# EAGLE board Digital Temperature Sensor Breakout - TMP102-GiantPanel (EAGLE 6.4), part 1 of 9
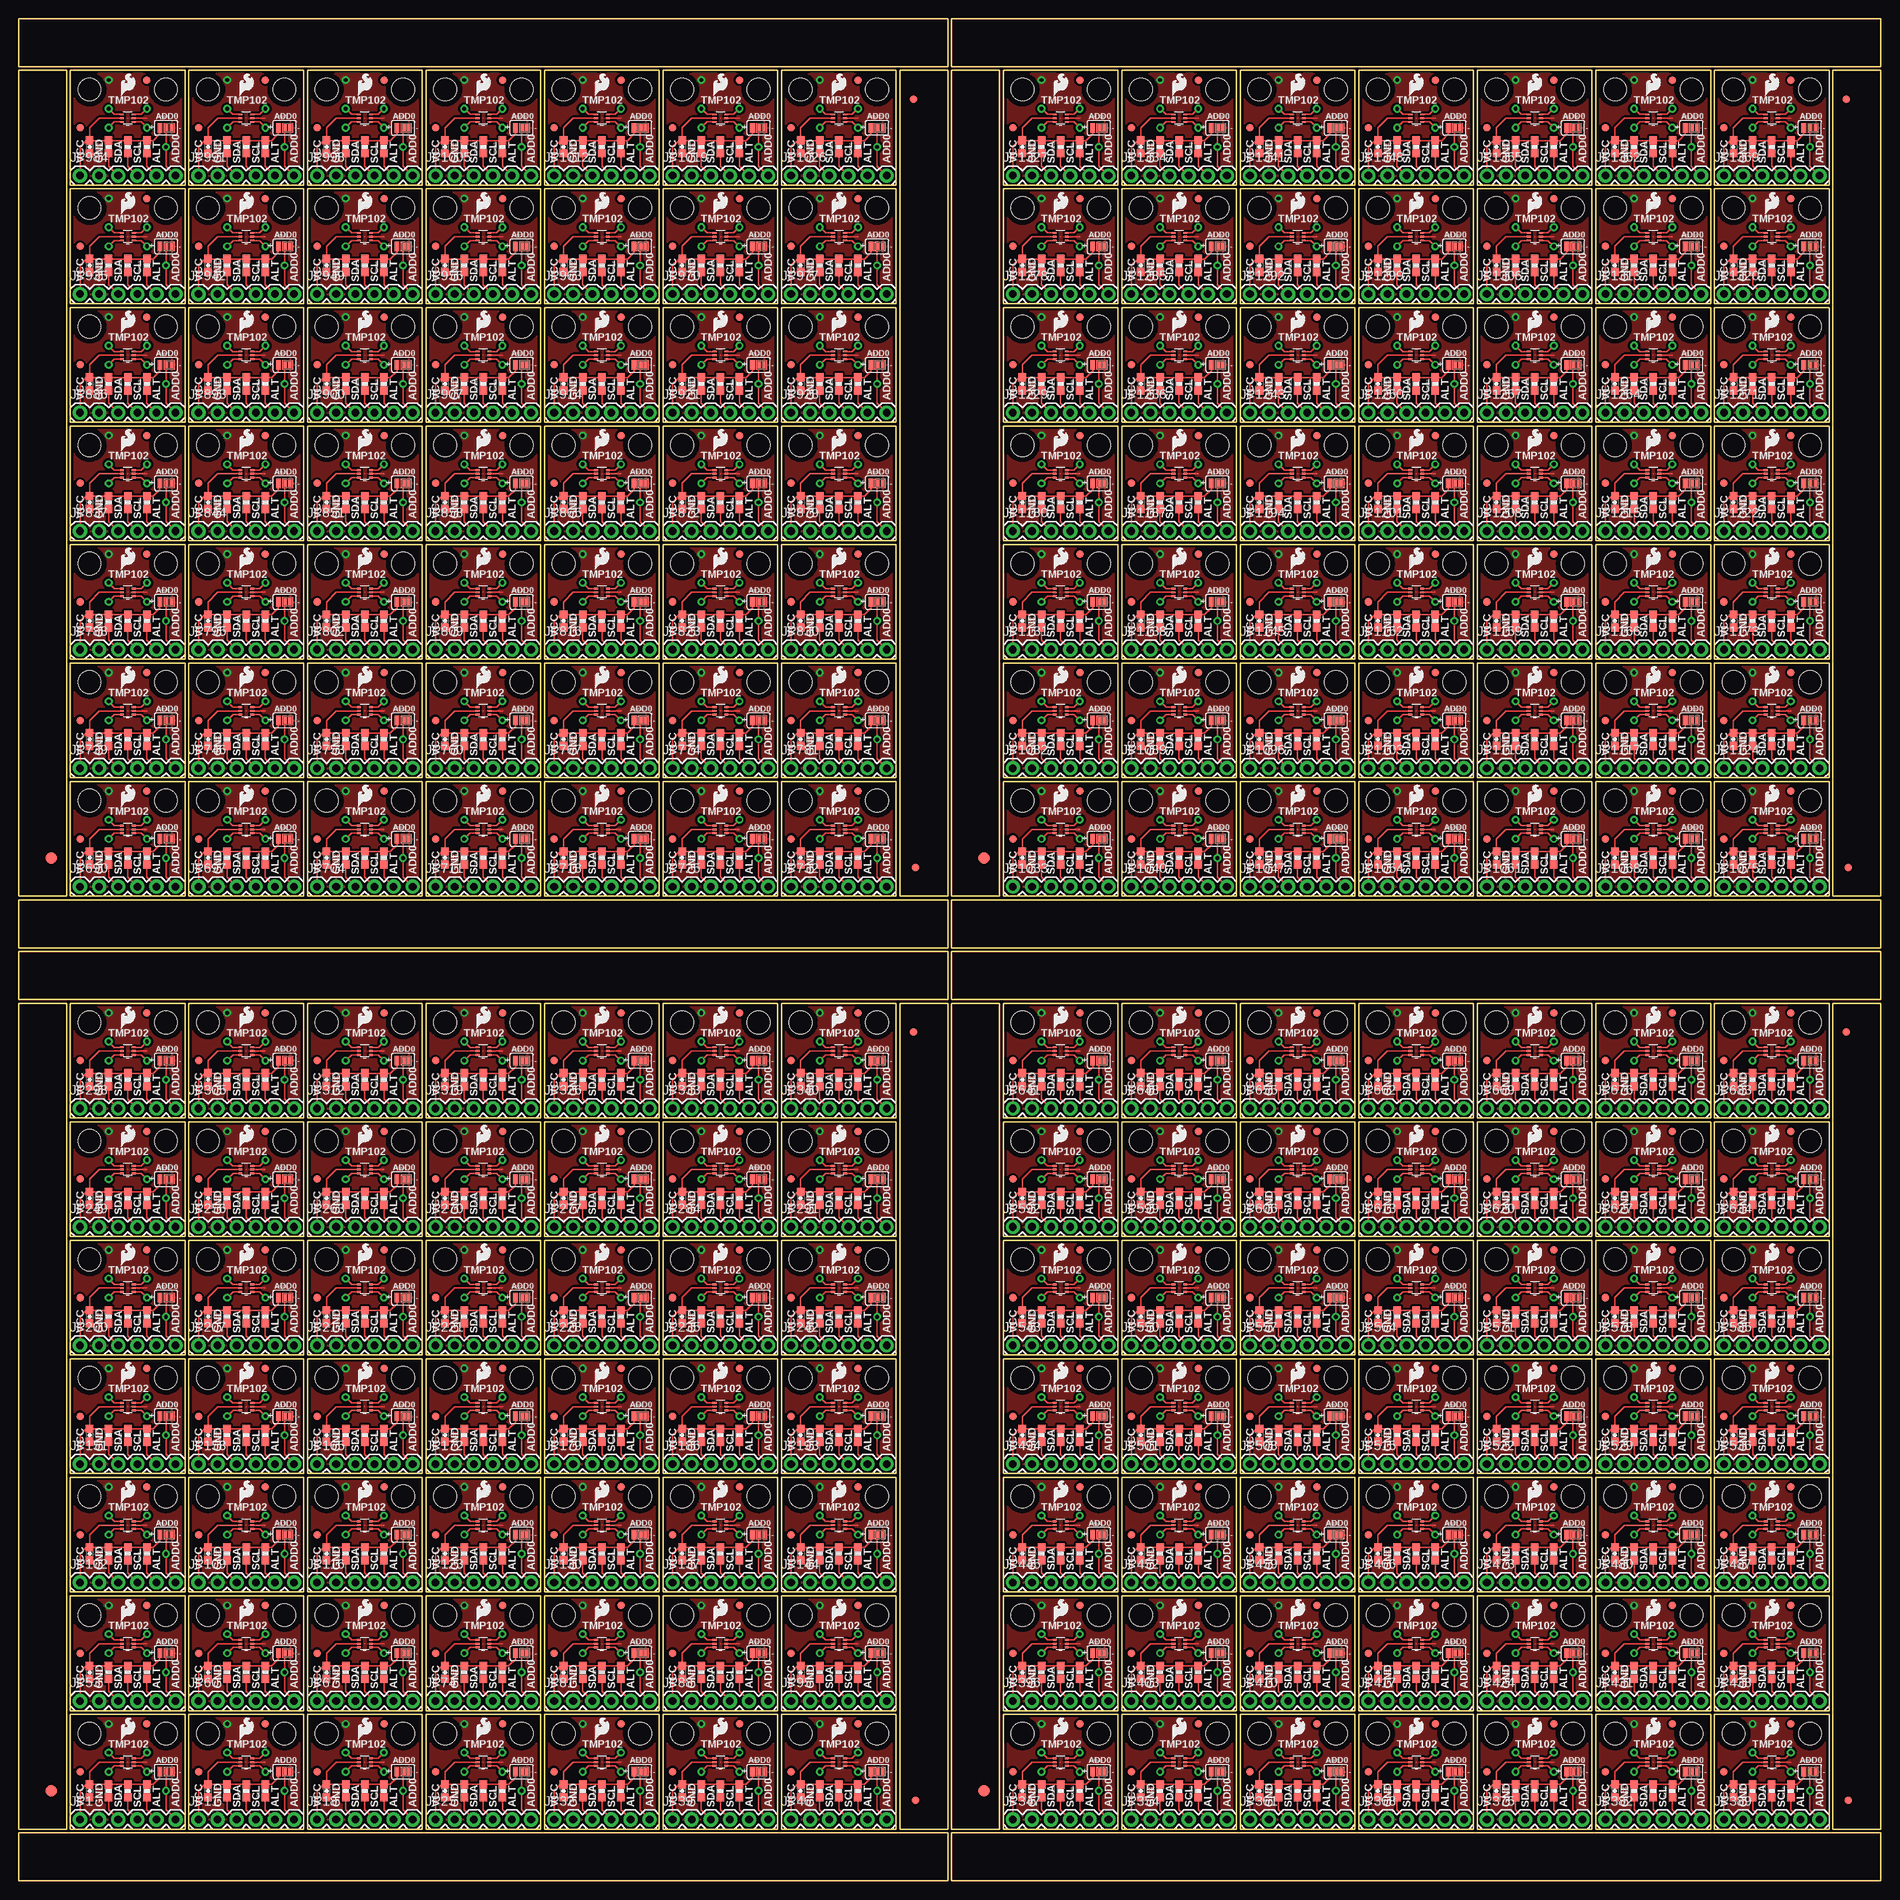
[diagram p0: board, top side]
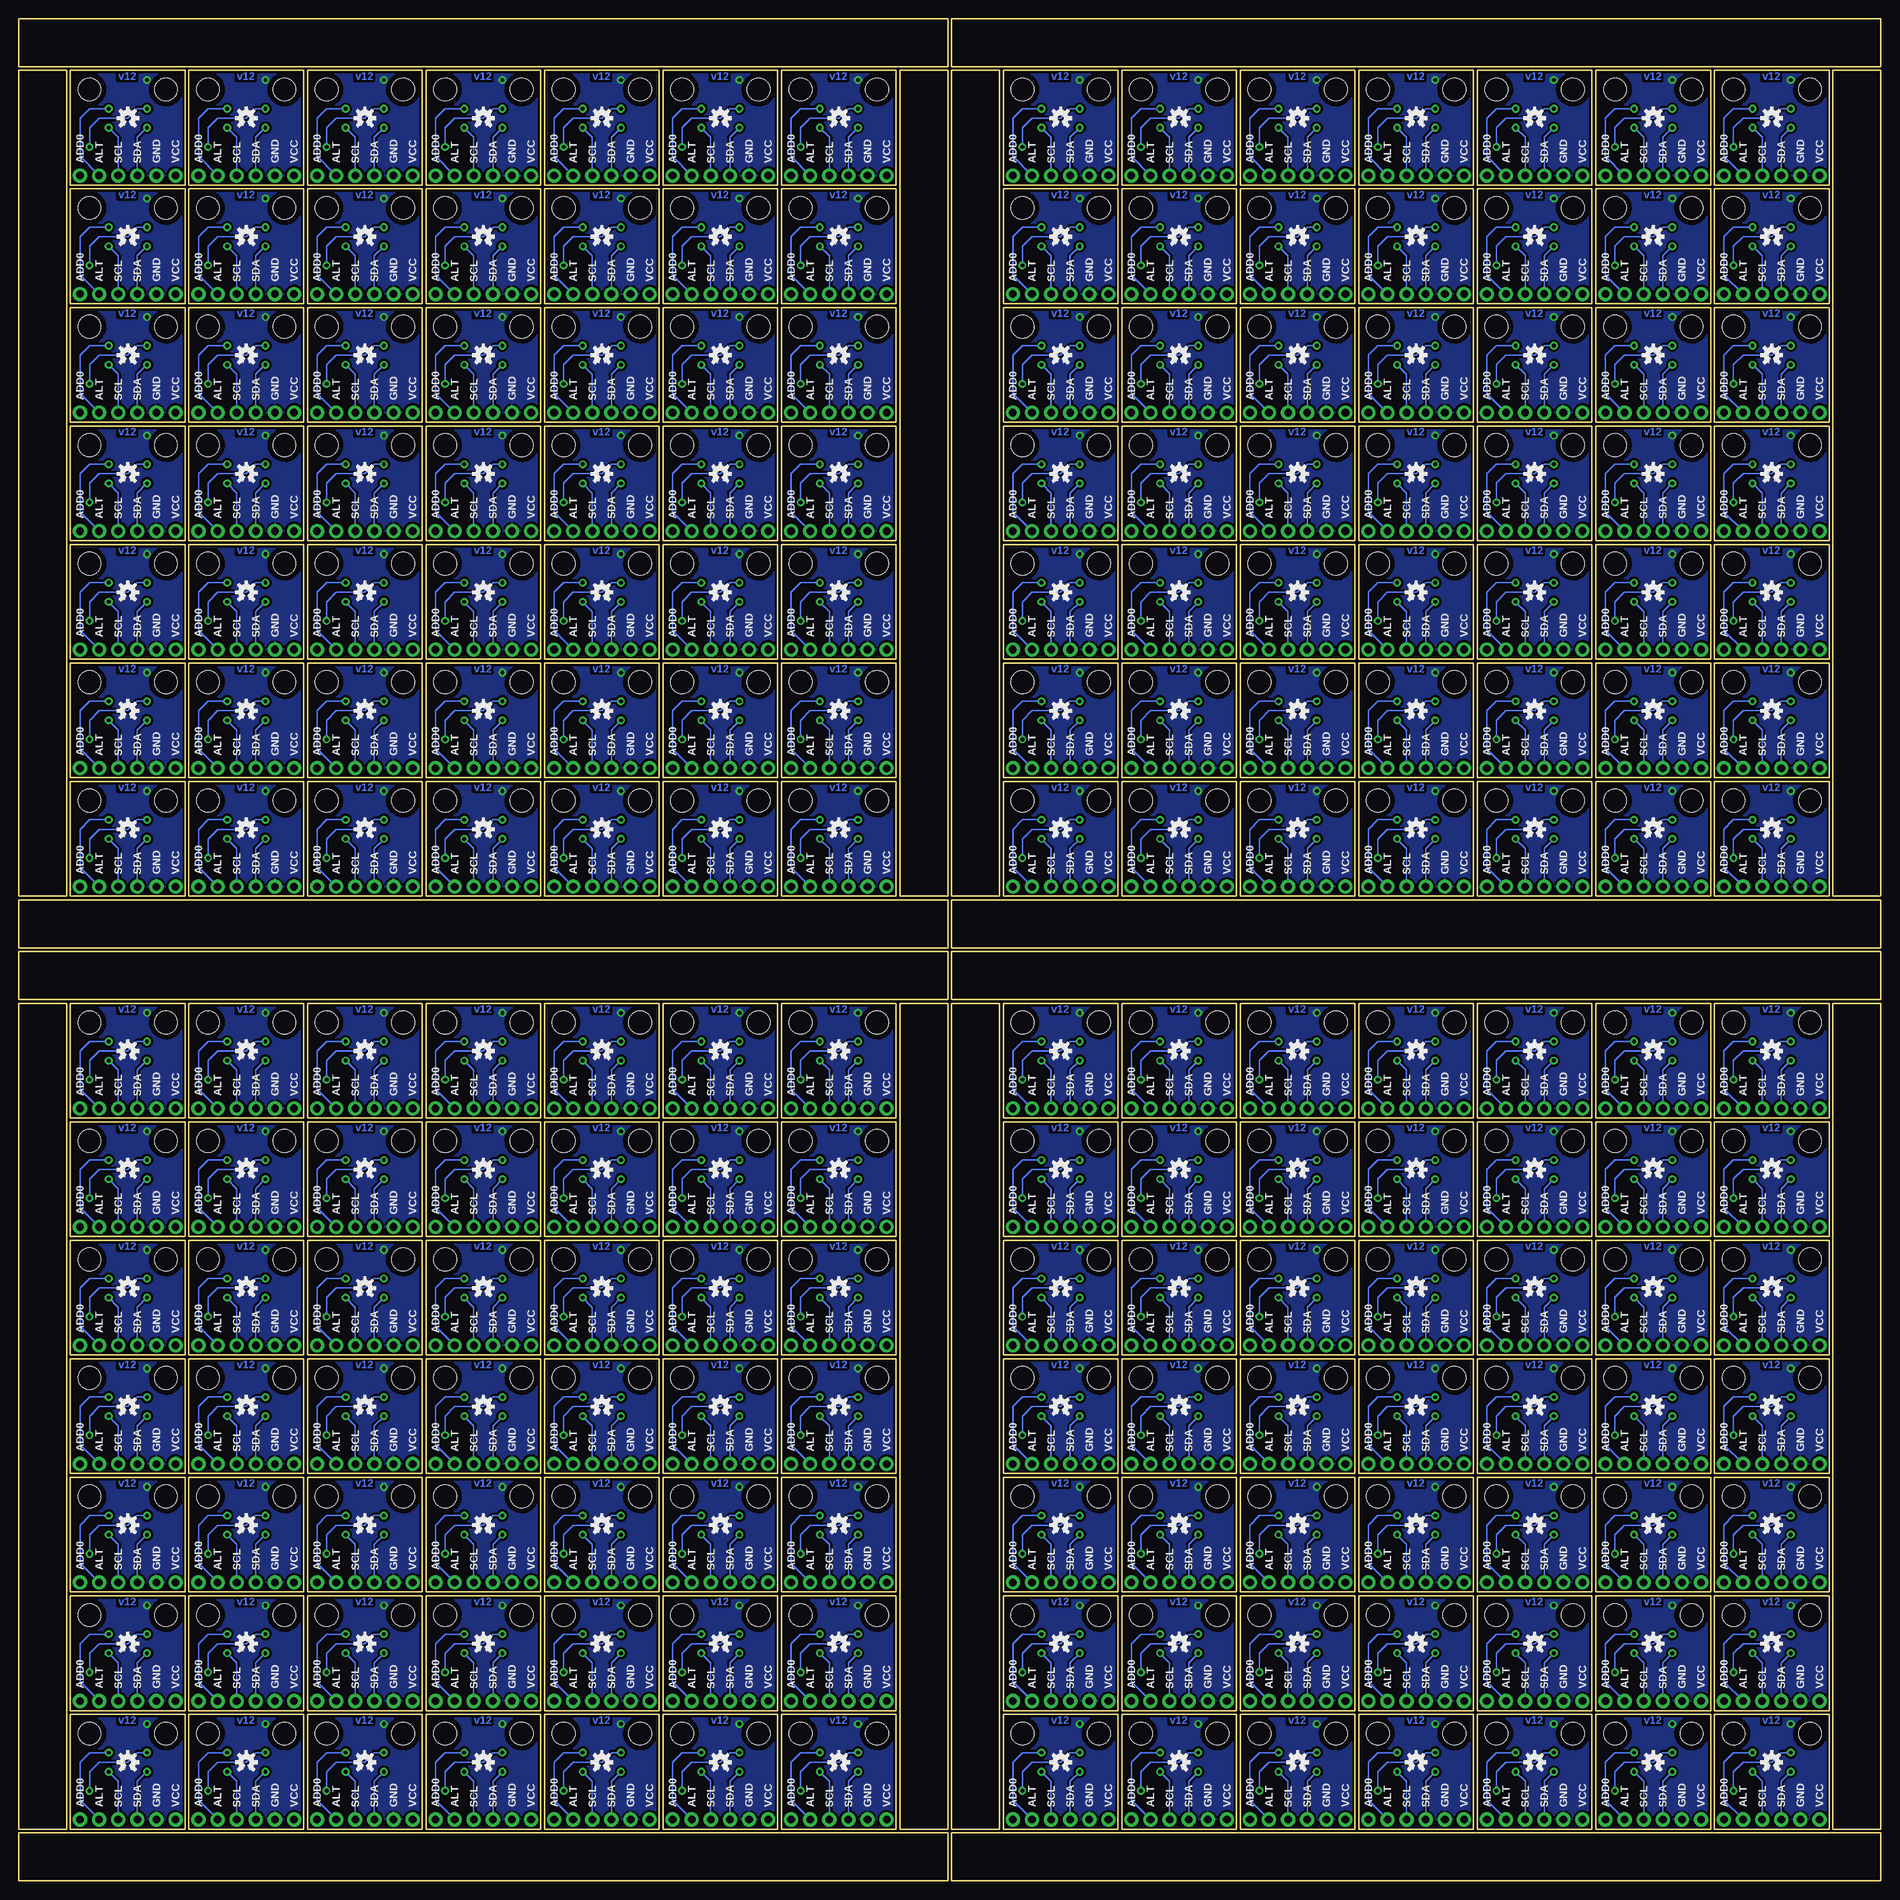
[diagram p1: board, bottom side, seen from below]

Size 247.4 x 247.4 mm. Coordinates in mm from the lower left corner, seen from the top.
Outline: 864 segments
Copper layers (1*16): Top 0.035mm / dielectric 1.5mm / Bottom 0.035mm
Design rules "SparkFun": minimum track width 7mil, minimum drill 15mil, track to track 8mil, track to pad 8mil, pad to pad 8mil, via to via 8mil, smd to smd 8mil, copper to edge 8mil, drill to drill 8mil, minimum pad ring 12mil, minimum via ring 10mil, stop-mask expansion 4mil, vias tented up to drill 20mil, thermal gap 10mil

## Footprints (pad centres in the part's own frame; a part is rotated, then mirrored left to right if it is on the bottom)
0603-CAP = smd 1.1 x 1: 1 -0.85,0; 2 0.85,0
FIDUCIAL-1.5X3 = smd 1.5 x 1.5: 1 0,0
FIDUCIAL-1X2 = smd 1 x 1: 1 0,0
1X06 = drill 1.016 pad 1.88: 1 0,0; 2 2.54,0; 3 5.08,0; 4 7.62,0; 5 10.16,0; 6 12.7,0
SJ_3_PASTE2&3 = smd 0.635 x 1.27: 1 -0.813,0; 2 0,0; 3 0.813,0
STAND-OFF-TIGHT = hole 3.048: 0,0
0603-RES = smd 1.1 x 1: 1 -0.85,0; 2 0.85,0
SOT563-2 = smd 0.508 x 0.249: 1 -0.8,0.498; 2 -0.8,0.003; 3 -0.8,-0.506; 4 0.776,-0.506; 5 0.776,0.003; 6 0.776,0.498

## Placement (x,y rotation side)
C1  0.1uF  [0603-CAP]  9.4,11.94 270 top
C2  0.1uF  [0603-CAP]  25.15,11.94 270 top
C3  0.1uF  [0603-CAP]  40.89,11.94 270 top
C4  0.1uF  [0603-CAP]  56.64,11.94 270 top
C5  0.1uF  [0603-CAP]  72.39,11.94 270 top
C6  0.1uF  [0603-CAP]  88.14,11.94 270 top
C7  0.1uF  [0603-CAP]  103.89,11.94 270 top
C8  0.1uF  [0603-CAP]  9.4,27.69 270 top
C9  0.1uF  [0603-CAP]  25.15,27.69 270 top
C10  0.1uF  [0603-CAP]  40.89,27.69 270 top
C11  0.1uF  [0603-CAP]  56.64,27.69 270 top
C12  0.1uF  [0603-CAP]  72.39,27.69 270 top
C13  0.1uF  [0603-CAP]  88.14,27.69 270 top
C14  0.1uF  [0603-CAP]  103.89,27.69 270 top
C15  0.1uF  [0603-CAP]  9.4,43.43 270 top
C16  0.1uF  [0603-CAP]  25.15,43.43 270 top
C17  0.1uF  [0603-CAP]  40.89,43.43 270 top
C18  0.1uF  [0603-CAP]  56.64,43.43 270 top
C19  0.1uF  [0603-CAP]  72.39,43.43 270 top
C20  0.1uF  [0603-CAP]  88.14,43.43 270 top
C21  0.1uF  [0603-CAP]  103.89,43.43 270 top
C22  0.1uF  [0603-CAP]  9.4,59.18 270 top
C23  0.1uF  [0603-CAP]  25.15,59.18 270 top
C24  0.1uF  [0603-CAP]  40.89,59.18 270 top
C25  0.1uF  [0603-CAP]  56.64,59.18 270 top
C26  0.1uF  [0603-CAP]  72.39,59.18 270 top
C27  0.1uF  [0603-CAP]  88.14,59.18 270 top
C28  0.1uF  [0603-CAP]  103.89,59.18 270 top
C29  0.1uF  [0603-CAP]  9.4,74.93 270 top
C30  0.1uF  [0603-CAP]  25.15,74.93 270 top
C31  0.1uF  [0603-CAP]  40.89,74.93 270 top
C32  0.1uF  [0603-CAP]  56.64,74.93 270 top
C33  0.1uF  [0603-CAP]  72.39,74.93 270 top
C34  0.1uF  [0603-CAP]  88.14,74.93 270 top
C35  0.1uF  [0603-CAP]  103.89,74.93 270 top
C36  0.1uF  [0603-CAP]  9.4,90.68 270 top
C37  0.1uF  [0603-CAP]  25.15,90.68 270 top
C38  0.1uF  [0603-CAP]  40.89,90.68 270 top
C39  0.1uF  [0603-CAP]  56.64,90.68 270 top
C40  0.1uF  [0603-CAP]  72.39,90.68 270 top
C41  0.1uF  [0603-CAP]  88.14,90.68 270 top
C42  0.1uF  [0603-CAP]  103.89,90.68 270 top
C43  0.1uF  [0603-CAP]  9.4,106.43 270 top
C44  0.1uF  [0603-CAP]  25.15,106.43 270 top
C45  0.1uF  [0603-CAP]  40.89,106.43 270 top
C46  0.1uF  [0603-CAP]  56.64,106.43 270 top
C47  0.1uF  [0603-CAP]  72.39,106.43 270 top
C48  0.1uF  [0603-CAP]  88.14,106.43 270 top
C49  0.1uF  [0603-CAP]  103.89,106.43 270 top
C50  0.1uF  [0603-CAP]  133.35,11.94 270 top
C51  0.1uF  [0603-CAP]  149.1,11.94 270 top
C52  0.1uF  [0603-CAP]  164.85,11.94 270 top
C53  0.1uF  [0603-CAP]  180.59,11.94 270 top
C54  0.1uF  [0603-CAP]  196.34,11.94 270 top
C55  0.1uF  [0603-CAP]  212.09,11.94 270 top
C56  0.1uF  [0603-CAP]  227.84,11.94 270 top
C57  0.1uF  [0603-CAP]  133.35,27.69 270 top
C58  0.1uF  [0603-CAP]  149.1,27.69 270 top
C59  0.1uF  [0603-CAP]  164.85,27.69 270 top
C60  0.1uF  [0603-CAP]  180.59,27.69 270 top
C61  0.1uF  [0603-CAP]  196.34,27.69 270 top
C62  0.1uF  [0603-CAP]  212.09,27.69 270 top
C63  0.1uF  [0603-CAP]  227.84,27.69 270 top
C64  0.1uF  [0603-CAP]  133.35,43.43 270 top
C65  0.1uF  [0603-CAP]  149.1,43.43 270 top
C66  0.1uF  [0603-CAP]  164.85,43.43 270 top
C67  0.1uF  [0603-CAP]  180.59,43.43 270 top
C68  0.1uF  [0603-CAP]  196.34,43.43 270 top
C69  0.1uF  [0603-CAP]  212.09,43.43 270 top
C70  0.1uF  [0603-CAP]  227.84,43.43 270 top
C71  0.1uF  [0603-CAP]  133.35,59.18 270 top
C72  0.1uF  [0603-CAP]  149.1,59.18 270 top
C73  0.1uF  [0603-CAP]  164.85,59.18 270 top
C74  0.1uF  [0603-CAP]  180.59,59.18 270 top
C75  0.1uF  [0603-CAP]  196.34,59.18 270 top
C76  0.1uF  [0603-CAP]  212.09,59.18 270 top
C77  0.1uF  [0603-CAP]  227.84,59.18 270 top
C78  0.1uF  [0603-CAP]  133.35,74.93 270 top
C79  0.1uF  [0603-CAP]  149.1,74.93 270 top
C80  0.1uF  [0603-CAP]  164.85,74.93 270 top
C81  0.1uF  [0603-CAP]  180.59,74.93 270 top
C82  0.1uF  [0603-CAP]  196.34,74.93 270 top
C83  0.1uF  [0603-CAP]  212.09,74.93 270 top
C84  0.1uF  [0603-CAP]  227.84,74.93 270 top
C85  0.1uF  [0603-CAP]  133.35,90.68 270 top
C86  0.1uF  [0603-CAP]  149.1,90.68 270 top
C87  0.1uF  [0603-CAP]  164.85,90.68 270 top
C88  0.1uF  [0603-CAP]  180.59,90.68 270 top
C89  0.1uF  [0603-CAP]  196.34,90.68 270 top
C90  0.1uF  [0603-CAP]  212.09,90.68 270 top
C91  0.1uF  [0603-CAP]  227.84,90.68 270 top
C92  0.1uF  [0603-CAP]  133.35,106.43 270 top
C93  0.1uF  [0603-CAP]  149.1,106.43 270 top
C94  0.1uF  [0603-CAP]  164.85,106.43 270 top
C95  0.1uF  [0603-CAP]  180.59,106.43 270 top
C96  0.1uF  [0603-CAP]  196.34,106.43 270 top
C97  0.1uF  [0603-CAP]  212.09,106.43 270 top
C98  0.1uF  [0603-CAP]  227.84,106.43 270 top
C99  0.1uF  [0603-CAP]  9.4,135.89 270 top
C100  0.1uF  [0603-CAP]  25.15,135.89 270 top
C101  0.1uF  [0603-CAP]  40.89,135.89 270 top
C102  0.1uF  [0603-CAP]  56.64,135.89 270 top
C103  0.1uF  [0603-CAP]  72.39,135.89 270 top
C104  0.1uF  [0603-CAP]  88.14,135.89 270 top
C105  0.1uF  [0603-CAP]  103.89,135.89 270 top
C106  0.1uF  [0603-CAP]  9.4,151.64 270 top
C107  0.1uF  [0603-CAP]  25.15,151.64 270 top
C108  0.1uF  [0603-CAP]  40.89,151.64 270 top
C109  0.1uF  [0603-CAP]  56.64,151.64 270 top
C110  0.1uF  [0603-CAP]  72.39,151.64 270 top
C111  0.1uF  [0603-CAP]  88.14,151.64 270 top
C112  0.1uF  [0603-CAP]  103.89,151.64 270 top
C113  0.1uF  [0603-CAP]  9.4,167.39 270 top
C114  0.1uF  [0603-CAP]  25.15,167.39 270 top
C115  0.1uF  [0603-CAP]  40.89,167.39 270 top
C116  0.1uF  [0603-CAP]  56.64,167.39 270 top
C117  0.1uF  [0603-CAP]  72.39,167.39 270 top
C118  0.1uF  [0603-CAP]  88.14,167.39 270 top
C119  0.1uF  [0603-CAP]  103.89,167.39 270 top
C120  0.1uF  [0603-CAP]  9.4,183.13 270 top
C121  0.1uF  [0603-CAP]  25.15,183.13 270 top
C122  0.1uF  [0603-CAP]  40.89,183.13 270 top
C123  0.1uF  [0603-CAP]  56.64,183.13 270 top
C124  0.1uF  [0603-CAP]  72.39,183.13 270 top
C125  0.1uF  [0603-CAP]  88.14,183.13 270 top
C126  0.1uF  [0603-CAP]  103.89,183.13 270 top
C127  0.1uF  [0603-CAP]  9.4,198.88 270 top
C128  0.1uF  [0603-CAP]  25.15,198.88 270 top
C129  0.1uF  [0603-CAP]  40.89,198.88 270 top
C130  0.1uF  [0603-CAP]  56.64,198.88 270 top
C131  0.1uF  [0603-CAP]  72.39,198.88 270 top
C132  0.1uF  [0603-CAP]  88.14,198.88 270 top
C133  0.1uF  [0603-CAP]  103.89,198.88 270 top
C134  0.1uF  [0603-CAP]  9.4,214.63 270 top
C135  0.1uF  [0603-CAP]  25.15,214.63 270 top
C136  0.1uF  [0603-CAP]  40.89,214.63 270 top
C137  0.1uF  [0603-CAP]  56.64,214.63 270 top
C138  0.1uF  [0603-CAP]  72.39,214.63 270 top
C139  0.1uF  [0603-CAP]  88.14,214.63 270 top
C140  0.1uF  [0603-CAP]  103.89,214.63 270 top
C141  0.1uF  [0603-CAP]  9.4,230.38 270 top
C142  0.1uF  [0603-CAP]  25.15,230.38 270 top
C143  0.1uF  [0603-CAP]  40.89,230.38 270 top
C144  0.1uF  [0603-CAP]  56.64,230.38 270 top
C145  0.1uF  [0603-CAP]  72.39,230.38 270 top
C146  0.1uF  [0603-CAP]  88.14,230.38 270 top
C147  0.1uF  [0603-CAP]  103.89,230.38 270 top
C148  0.1uF  [0603-CAP]  133.35,135.89 270 top
C149  0.1uF  [0603-CAP]  149.1,135.89 270 top
C150  0.1uF  [0603-CAP]  164.85,135.89 270 top
C151  0.1uF  [0603-CAP]  180.59,135.89 270 top
C152  0.1uF  [0603-CAP]  196.34,135.89 270 top
C153  0.1uF  [0603-CAP]  212.09,135.89 270 top
C154  0.1uF  [0603-CAP]  227.84,135.89 270 top
C155  0.1uF  [0603-CAP]  133.35,151.64 270 top
C156  0.1uF  [0603-CAP]  149.1,151.64 270 top
C157  0.1uF  [0603-CAP]  164.85,151.64 270 top
C158  0.1uF  [0603-CAP]  180.59,151.64 270 top
C159  0.1uF  [0603-CAP]  196.34,151.64 270 top
C160  0.1uF  [0603-CAP]  212.09,151.64 270 top
C161  0.1uF  [0603-CAP]  227.84,151.64 270 top
C162  0.1uF  [0603-CAP]  133.35,167.39 270 top
C163  0.1uF  [0603-CAP]  149.1,167.39 270 top
C164  0.1uF  [0603-CAP]  164.85,167.39 270 top
C165  0.1uF  [0603-CAP]  180.59,167.39 270 top
C166  0.1uF  [0603-CAP]  196.34,167.39 270 top
C167  0.1uF  [0603-CAP]  212.09,167.39 270 top
C168  0.1uF  [0603-CAP]  227.84,167.39 270 top
C169  0.1uF  [0603-CAP]  133.35,183.13 270 top
C170  0.1uF  [0603-CAP]  149.1,183.13 270 top
C171  0.1uF  [0603-CAP]  164.85,183.13 270 top
C172  0.1uF  [0603-CAP]  180.59,183.13 270 top
C173  0.1uF  [0603-CAP]  196.34,183.13 270 top
C174  0.1uF  [0603-CAP]  212.09,183.13 270 top
C175  0.1uF  [0603-CAP]  227.84,183.13 270 top
C176  0.1uF  [0603-CAP]  133.35,198.88 270 top
C177  0.1uF  [0603-CAP]  149.1,198.88 270 top
C178  0.1uF  [0603-CAP]  164.85,198.88 270 top
C179  0.1uF  [0603-CAP]  180.59,198.88 270 top
C180  0.1uF  [0603-CAP]  196.34,198.88 270 top
C181  0.1uF  [0603-CAP]  212.09,198.88 270 top
C182  0.1uF  [0603-CAP]  227.84,198.88 270 top
C183  0.1uF  [0603-CAP]  133.35,214.63 270 top
C184  0.1uF  [0603-CAP]  149.1,214.63 270 top
C185  0.1uF  [0603-CAP]  164.85,214.63 270 top
C186  0.1uF  [0603-CAP]  180.59,214.63 270 top
C187  0.1uF  [0603-CAP]  196.34,214.63 270 top
C188  0.1uF  [0603-CAP]  212.09,214.63 270 top
C189  0.1uF  [0603-CAP]  227.84,214.63 270 top
C190  0.1uF  [0603-CAP]  133.35,230.38 270 top
C191  0.1uF  [0603-CAP]  149.1,230.38 270 top
C192  0.1uF  [0603-CAP]  164.85,230.38 270 top
C193  0.1uF  [0603-CAP]  180.59,230.38 270 top
C194  0.1uF  [0603-CAP]  196.34,230.38 270 top
C195  0.1uF  [0603-CAP]  212.09,230.38 270 top
C196  0.1uF  [0603-CAP]  227.84,230.38 270 top
E$1  [FIDUCIAL-1.5X3]  4.32,11.94 0 top
E$2  [FIDUCIAL-1X2]  243.08,10.67 0 top
E$3  [FIDUCIAL-1X2]  242.82,112.78 180 top
E$4  [FIDUCIAL-1X2]  119.13,10.67 0 top
E$5  [FIDUCIAL-1X2]  118.87,112.78 180 top
E$6  [FIDUCIAL-1.5X3]  128.27,11.94 0 top
E$7  [FIDUCIAL-1X2]  119.13,134.62 0 top
E$8  [FIDUCIAL-1X2]  118.87,236.73 180 top
E$9  [FIDUCIAL-1.5X3]  4.32,135.89 0 top
E$10  [FIDUCIAL-1X2]  243.08,134.62 0 top
E$11  [FIDUCIAL-1X2]  242.82,236.73 180 top
E$12  [FIDUCIAL-1.5X3]  128.27,135.89 0 top
JP1  [1X06]  8.13,8.13 0 top
JP2  JUMPER-32-3  [SJ_3_PASTE2&3]  19.56,14.48 0 top
JP3  LOGO-SFESK  [SFE-LOGO-FLAME]  13.59,18.8 0 top
JP4  FIDUCIAL1X2  [FIDUCIAL-1X2]  8.13,14.48 0 top
JP5  FIDUCIAL1X2  [FIDUCIAL-1X2]  17.02,20.83 0 top
JP6  STAND-OFFTIGHT  [STAND-OFF-TIGHT]  9.4,19.56 0 top
JP7  STAND-OFFTIGHT  [STAND-OFF-TIGHT]  19.56,19.56 0 top
JP8  LOGO-SFESK  [SFE-LOGO-FLAME]  29.34,18.8 0 top
JP9  FIDUCIAL1X2  [FIDUCIAL-1X2]  23.88,14.48 0 top
JP10  FIDUCIAL1X2  [FIDUCIAL-1X2]  32.77,20.83 0 top
JP11  [1X06]  23.88,8.13 0 top
JP12  JUMPER-32-3  [SJ_3_PASTE2&3]  35.31,14.48 0 top
JP13  STAND-OFFTIGHT  [STAND-OFF-TIGHT]  25.15,19.56 0 top
JP14  STAND-OFFTIGHT  [STAND-OFF-TIGHT]  35.31,19.56 0 top
JP15  LOGO-SFESK  [SFE-LOGO-FLAME]  45.09,18.8 0 top
JP16  FIDUCIAL1X2  [FIDUCIAL-1X2]  39.62,14.48 0 top
JP17  FIDUCIAL1X2  [FIDUCIAL-1X2]  48.51,20.83 0 top
JP18  [1X06]  39.62,8.13 0 top
JP19  JUMPER-32-3  [SJ_3_PASTE2&3]  51.05,14.48 0 top
JP20  STAND-OFFTIGHT  [STAND-OFF-TIGHT]  40.89,19.56 0 top
JP21  STAND-OFFTIGHT  [STAND-OFF-TIGHT]  51.05,19.56 0 top
JP22  LOGO-SFESK  [SFE-LOGO-FLAME]  60.83,18.8 0 top
JP23  FIDUCIAL1X2  [FIDUCIAL-1X2]  55.37,14.48 0 top
JP24  FIDUCIAL1X2  [FIDUCIAL-1X2]  64.26,20.83 0 top
JP25  [1X06]  55.37,8.13 0 top
JP26  JUMPER-32-3  [SJ_3_PASTE2&3]  66.8,14.48 0 top
JP27  STAND-OFFTIGHT  [STAND-OFF-TIGHT]  56.64,19.56 0 top
JP28  STAND-OFFTIGHT  [STAND-OFF-TIGHT]  66.8,19.56 0 top
JP29  LOGO-SFESK  [SFE-LOGO-FLAME]  76.58,18.8 0 top
JP30  FIDUCIAL1X2  [FIDUCIAL-1X2]  71.12,14.48 0 top
JP31  FIDUCIAL1X2  [FIDUCIAL-1X2]  80.01,20.83 0 top
JP32  [1X06]  71.12,8.13 0 top
JP33  JUMPER-32-3  [SJ_3_PASTE2&3]  82.55,14.48 0 top
JP34  STAND-OFFTIGHT  [STAND-OFF-TIGHT]  72.39,19.56 0 top
JP35  STAND-OFFTIGHT  [STAND-OFF-TIGHT]  82.55,19.56 0 top
JP36  LOGO-SFESK  [SFE-LOGO-FLAME]  92.33,18.8 0 top
JP37  FIDUCIAL1X2  [FIDUCIAL-1X2]  86.87,14.48 0 top
JP38  FIDUCIAL1X2  [FIDUCIAL-1X2]  95.76,20.83 0 top
JP39  [1X06]  86.87,8.13 0 top
JP40  JUMPER-32-3  [SJ_3_PASTE2&3]  98.3,14.48 0 top
JP41  STAND-OFFTIGHT  [STAND-OFF-TIGHT]  88.14,19.56 0 top
JP42  STAND-OFFTIGHT  [STAND-OFF-TIGHT]  98.3,19.56 0 top
JP43  LOGO-SFESK  [SFE-LOGO-FLAME]  108.08,18.8 0 top
JP44  FIDUCIAL1X2  [FIDUCIAL-1X2]  102.62,14.48 0 top
JP45  FIDUCIAL1X2  [FIDUCIAL-1X2]  111.51,20.83 0 top
JP46  [1X06]  102.62,8.13 0 top
JP47  JUMPER-32-3  [SJ_3_PASTE2&3]  114.05,14.48 0 top
JP48  STAND-OFFTIGHT  [STAND-OFF-TIGHT]  103.89,19.56 0 top
JP49  STAND-OFFTIGHT  [STAND-OFF-TIGHT]  114.05,19.56 0 top
JP50  LOGO-SFESK  [SFE-LOGO-FLAME]  13.59,34.54 0 top
JP51  FIDUCIAL1X2  [FIDUCIAL-1X2]  8.13,30.23 0 top
JP52  FIDUCIAL1X2  [FIDUCIAL-1X2]  17.02,36.58 0 top
JP53  [1X06]  8.13,23.88 0 top
JP54  JUMPER-32-3  [SJ_3_PASTE2&3]  19.56,30.23 0 top
JP55  STAND-OFFTIGHT  [STAND-OFF-TIGHT]  9.4,35.31 0 top
JP56  STAND-OFFTIGHT  [STAND-OFF-TIGHT]  19.56,35.31 0 top
JP57  LOGO-SFESK  [SFE-LOGO-FLAME]  29.34,34.54 0 top
JP58  FIDUCIAL1X2  [FIDUCIAL-1X2]  23.88,30.23 0 top
JP59  FIDUCIAL1X2  [FIDUCIAL-1X2]  32.77,36.58 0 top
JP60  [1X06]  23.88,23.88 0 top
JP61  JUMPER-32-3  [SJ_3_PASTE2&3]  35.31,30.23 0 top
JP62  STAND-OFFTIGHT  [STAND-OFF-TIGHT]  25.15,35.31 0 top
JP63  STAND-OFFTIGHT  [STAND-OFF-TIGHT]  35.31,35.31 0 top
JP64  LOGO-SFESK  [SFE-LOGO-FLAME]  45.09,34.54 0 top
JP65  FIDUCIAL1X2  [FIDUCIAL-1X2]  39.62,30.23 0 top
JP66  FIDUCIAL1X2  [FIDUCIAL-1X2]  48.51,36.58 0 top
JP67  [1X06]  39.62,23.88 0 top
JP68  JUMPER-32-3  [SJ_3_PASTE2&3]  51.05,30.23 0 top
JP69  STAND-OFFTIGHT  [STAND-OFF-TIGHT]  40.89,35.31 0 top
JP70  STAND-OFFTIGHT  [STAND-OFF-TIGHT]  51.05,35.31 0 top
JP71  LOGO-SFESK  [SFE-LOGO-FLAME]  60.83,34.54 0 top
JP72  FIDUCIAL1X2  [FIDUCIAL-1X2]  55.37,30.23 0 top
JP73  FIDUCIAL1X2  [FIDUCIAL-1X2]  64.26,36.58 0 top
JP74  [1X06]  55.37,23.88 0 top
JP75  JUMPER-32-3  [SJ_3_PASTE2&3]  66.8,30.23 0 top
JP76  STAND-OFFTIGHT  [STAND-OFF-TIGHT]  56.64,35.31 0 top
JP77  STAND-OFFTIGHT  [STAND-OFF-TIGHT]  66.8,35.31 0 top
JP78  LOGO-SFESK  [SFE-LOGO-FLAME]  76.58,34.54 0 top
JP79  FIDUCIAL1X2  [FIDUCIAL-1X2]  71.12,30.23 0 top
JP80  FIDUCIAL1X2  [FIDUCIAL-1X2]  80.01,36.58 0 top
JP81  [1X06]  71.12,23.88 0 top
JP82  JUMPER-32-3  [SJ_3_PASTE2&3]  82.55,30.23 0 top
JP83  STAND-OFFTIGHT  [STAND-OFF-TIGHT]  72.39,35.31 0 top
JP84  STAND-OFFTIGHT  [STAND-OFF-TIGHT]  82.55,35.31 0 top
JP85  LOGO-SFESK  [SFE-LOGO-FLAME]  92.33,34.54 0 top
JP86  FIDUCIAL1X2  [FIDUCIAL-1X2]  86.87,30.23 0 top
JP87  FIDUCIAL1X2  [FIDUCIAL-1X2]  95.76,36.58 0 top
JP88  [1X06]  86.87,23.88 0 top
JP89  JUMPER-32-3  [SJ_3_PASTE2&3]  98.3,30.23 0 top
JP90  STAND-OFFTIGHT  [STAND-OFF-TIGHT]  88.14,35.31 0 top
JP91  STAND-OFFTIGHT  [STAND-OFF-TIGHT]  98.3,35.31 0 top
JP92  LOGO-SFESK  [SFE-LOGO-FLAME]  108.08,34.54 0 top
JP93  FIDUCIAL1X2  [FIDUCIAL-1X2]  102.62,30.23 0 top
JP94  FIDUCIAL1X2  [FIDUCIAL-1X2]  111.51,36.58 0 top
JP95  [1X06]  102.62,23.88 0 top
JP96  JUMPER-32-3  [SJ_3_PASTE2&3]  114.05,30.23 0 top
JP97  STAND-OFFTIGHT  [STAND-OFF-TIGHT]  103.89,35.31 0 top
JP98  STAND-OFFTIGHT  [STAND-OFF-TIGHT]  114.05,35.31 0 top
JP99  LOGO-SFESK  [SFE-LOGO-FLAME]  13.59,50.29 0 top
JP100  FIDUCIAL1X2  [FIDUCIAL-1X2]  8.13,45.97 0 top
JP101  FIDUCIAL1X2  [FIDUCIAL-1X2]  17.02,52.32 0 top
JP102  [1X06]  8.13,39.62 0 top
JP103  JUMPER-32-3  [SJ_3_PASTE2&3]  19.56,45.97 0 top
JP104  STAND-OFFTIGHT  [STAND-OFF-TIGHT]  9.4,51.05 0 top
JP105  STAND-OFFTIGHT  [STAND-OFF-TIGHT]  19.56,51.05 0 top
JP106  LOGO-SFESK  [SFE-LOGO-FLAME]  29.34,50.29 0 top
JP107  FIDUCIAL1X2  [FIDUCIAL-1X2]  23.88,45.97 0 top
JP108  FIDUCIAL1X2  [FIDUCIAL-1X2]  32.77,52.32 0 top
JP109  [1X06]  23.88,39.62 0 top
JP110  JUMPER-32-3  [SJ_3_PASTE2&3]  35.31,45.97 0 top
JP111  STAND-OFFTIGHT  [STAND-OFF-TIGHT]  25.15,51.05 0 top
JP112  STAND-OFFTIGHT  [STAND-OFF-TIGHT]  35.31,51.05 0 top
JP113  LOGO-SFESK  [SFE-LOGO-FLAME]  45.09,50.29 0 top
JP114  FIDUCIAL1X2  [FIDUCIAL-1X2]  39.62,45.97 0 top
JP115  FIDUCIAL1X2  [FIDUCIAL-1X2]  48.51,52.32 0 top
JP116  [1X06]  39.62,39.62 0 top
JP117  JUMPER-32-3  [SJ_3_PASTE2&3]  51.05,45.97 0 top
JP118  STAND-OFFTIGHT  [STAND-OFF-TIGHT]  40.89,51.05 0 top
JP119  STAND-OFFTIGHT  [STAND-OFF-TIGHT]  51.05,51.05 0 top
JP120  LOGO-SFESK  [SFE-LOGO-FLAME]  60.83,50.29 0 top
JP121  FIDUCIAL1X2  [FIDUCIAL-1X2]  55.37,45.97 0 top
JP122  FIDUCIAL1X2  [FIDUCIAL-1X2]  64.26,52.32 0 top
JP123  [1X06]  55.37,39.62 0 top
JP124  JUMPER-32-3  [SJ_3_PASTE2&3]  66.8,45.97 0 top
JP125  STAND-OFFTIGHT  [STAND-OFF-TIGHT]  56.64,51.05 0 top
JP126  STAND-OFFTIGHT  [STAND-OFF-TIGHT]  66.8,51.05 0 top
JP127  LOGO-SFESK  [SFE-LOGO-FLAME]  76.58,50.29 0 top
JP128  FIDUCIAL1X2  [FIDUCIAL-1X2]  71.12,45.97 0 top
JP129  FIDUCIAL1X2  [FIDUCIAL-1X2]  80.01,52.32 0 top
JP130  [1X06]  71.12,39.62 0 top
JP131  JUMPER-32-3  [SJ_3_PASTE2&3]  82.55,45.97 0 top
JP132  STAND-OFFTIGHT  [STAND-OFF-TIGHT]  72.39,51.05 0 top
JP133  STAND-OFFTIGHT  [STAND-OFF-TIGHT]  82.55,51.05 0 top
JP134  LOGO-SFESK  [SFE-LOGO-FLAME]  92.33,50.29 0 top
JP135  FIDUCIAL1X2  [FIDUCIAL-1X2]  86.87,45.97 0 top
JP136  FIDUCIAL1X2  [FIDUCIAL-1X2]  95.76,52.32 0 top
JP137  [1X06]  86.87,39.62 0 top
JP138  JUMPER-32-3  [SJ_3_PASTE2&3]  98.3,45.97 0 top
JP139  STAND-OFFTIGHT  [STAND-OFF-TIGHT]  88.14,51.05 0 top
JP140  STAND-OFFTIGHT  [STAND-OFF-TIGHT]  98.3,51.05 0 top
JP141  LOGO-SFESK  [SFE-LOGO-FLAME]  108.08,50.29 0 top
JP142  FIDUCIAL1X2  [FIDUCIAL-1X2]  102.62,45.97 0 top
JP143  FIDUCIAL1X2  [FIDUCIAL-1X2]  111.51,52.32 0 top
JP144  [1X06]  102.62,39.62 0 top
JP145  JUMPER-32-3  [SJ_3_PASTE2&3]  114.05,45.97 0 top
JP146  STAND-OFFTIGHT  [STAND-OFF-TIGHT]  103.89,51.05 0 top
JP147  STAND-OFFTIGHT  [STAND-OFF-TIGHT]  114.05,51.05 0 top
JP148  LOGO-SFESK  [SFE-LOGO-FLAME]  13.59,66.04 0 top
JP149  FIDUCIAL1X2  [FIDUCIAL-1X2]  8.13,61.72 0 top
JP150  FIDUCIAL1X2  [FIDUCIAL-1X2]  17.02,68.07 0 top
JP151  [1X06]  8.13,55.37 0 top
JP152  JUMPER-32-3  [SJ_3_PASTE2&3]  19.56,61.72 0 top
JP153  STAND-OFFTIGHT  [STAND-OFF-TIGHT]  9.4,66.8 0 top
JP154  STAND-OFFTIGHT  [STAND-OFF-TIGHT]  19.56,66.8 0 top
JP155  LOGO-SFESK  [SFE-LOGO-FLAME]  29.34,66.04 0 top
JP156  FIDUCIAL1X2  [FIDUCIAL-1X2]  23.88,61.72 0 top
JP157  FIDUCIAL1X2  [FIDUCIAL-1X2]  32.77,68.07 0 top
JP158  [1X06]  23.88,55.37 0 top
JP159  JUMPER-32-3  [SJ_3_PASTE2&3]  35.31,61.72 0 top
JP160  STAND-OFFTIGHT  [STAND-OFF-TIGHT]  25.15,66.8 0 top
JP161  STAND-OFFTIGHT  [STAND-OFF-TIGHT]  35.31,66.8 0 top
JP162  LOGO-SFESK  [SFE-LOGO-FLAME]  45.09,66.04 0 top
JP163  FIDUCIAL1X2  [FIDUCIAL-1X2]  39.62,61.72 0 top
JP164  FIDUCIAL1X2  [FIDUCIAL-1X2]  48.51,68.07 0 top
JP165  [1X06]  39.62,55.37 0 top
JP166  JUMPER-32-3  [SJ_3_PASTE2&3]  51.05,61.72 0 top
JP167  STAND-OFFTIGHT  [STAND-OFF-TIGHT]  40.89,66.8 0 top
JP168  STAND-OFFTIGHT  [STAND-OFF-TIGHT]  51.05,66.8 0 top
JP169  LOGO-SFESK  [SFE-LOGO-FLAME]  60.83,66.04 0 top
JP170  FIDUCIAL1X2  [FIDUCIAL-1X2]  55.37,61.72 0 top
JP171  FIDUCIAL1X2  [FIDUCIAL-1X2]  64.26,68.07 0 top
JP172  [1X06]  55.37,55.37 0 top
JP173  JUMPER-32-3  [SJ_3_PASTE2&3]  66.8,61.72 0 top
JP174  STAND-OFFTIGHT  [STAND-OFF-TIGHT]  56.64,66.8 0 top
JP175  STAND-OFFTIGHT  [STAND-OFF-TIGHT]  66.8,66.8 0 top
JP176  LOGO-SFESK  [SFE-LOGO-FLAME]  76.58,66.04 0 top
JP177  FIDUCIAL1X2  [FIDUCIAL-1X2]  71.12,61.72 0 top
JP178  FIDUCIAL1X2  [FIDUCIAL-1X2]  80.01,68.07 0 top
JP179  [1X06]  71.12,55.37 0 top
JP180  JUMPER-32-3  [SJ_3_PASTE2&3]  82.55,61.72 0 top
JP181  STAND-OFFTIGHT  [STAND-OFF-TIGHT]  72.39,66.8 0 top
JP182  STAND-OFFTIGHT  [STAND-OFF-TIGHT]  82.55,66.8 0 top
JP183  LOGO-SFESK  [SFE-LOGO-FLAME]  92.33,66.04 0 top
JP184  FIDUCIAL1X2  [FIDUCIAL-1X2]  86.87,61.72 0 top
JP185  FIDUCIAL1X2  [FIDUCIAL-1X2]  95.76,68.07 0 top
JP186  [1X06]  86.87,55.37 0 top
JP187  JUMPER-32-3  [SJ_3_PASTE2&3]  98.3,61.72 0 top
JP188  STAND-OFFTIGHT  [STAND-OFF-TIGHT]  88.14,66.8 0 top
JP189  STAND-OFFTIGHT  [STAND-OFF-TIGHT]  98.3,66.8 0 top
JP190  LOGO-SFESK  [SFE-LOGO-FLAME]  108.08,66.04 0 top
JP191  FIDUCIAL1X2  [FIDUCIAL-1X2]  102.62,61.72 0 top
JP192  FIDUCIAL1X2  [FIDUCIAL-1X2]  111.51,68.07 0 top
JP193  [1X06]  102.62,55.37 0 top
JP194  JUMPER-32-3  [SJ_3_PASTE2&3]  114.05,61.72 0 top
JP195  STAND-OFFTIGHT  [STAND-OFF-TIGHT]  103.89,66.8 0 top
JP196  STAND-OFFTIGHT  [STAND-OFF-TIGHT]  114.05,66.8 0 top
JP197  LOGO-SFESK  [SFE-LOGO-FLAME]  13.59,81.79 0 top
JP198  FIDUCIAL1X2  [FIDUCIAL-1X2]  8.13,77.47 0 top
JP199  FIDUCIAL1X2  [FIDUCIAL-1X2]  17.02,83.82 0 top
JP200  [1X06]  8.13,71.12 0 top
JP201  JUMPER-32-3  [SJ_3_PASTE2&3]  19.56,77.47 0 top
JP202  STAND-OFFTIGHT  [STAND-OFF-TIGHT]  9.4,82.55 0 top
JP203  STAND-OFFTIGHT  [STAND-OFF-TIGHT]  19.56,82.55 0 top
JP204  LOGO-SFESK  [SFE-LOGO-FLAME]  29.34,81.79 0 top
JP205  FIDUCIAL1X2  [FIDUCIAL-1X2]  23.88,77.47 0 top
JP206  FIDUCIAL1X2  [FIDUCIAL-1X2]  32.77,83.82 0 top
JP207  [1X06]  23.88,71.12 0 top
JP208  JUMPER-32-3  [SJ_3_PASTE2&3]  35.31,77.47 0 top
JP209  STAND-OFFTIGHT  [STAND-OFF-TIGHT]  25.15,82.55 0 top
JP210  STAND-OFFTIGHT  [STAND-OFF-TIGHT]  35.31,82.55 0 top
JP211  LOGO-SFESK  [SFE-LOGO-FLAME]  45.09,81.79 0 top
JP212  FIDUCIAL1X2  [FIDUCIAL-1X2]  39.62,77.47 0 top
JP213  FIDUCIAL1X2  [FIDUCIAL-1X2]  48.51,83.82 0 top
JP214  [1X06]  39.62,71.12 0 top
JP215  JUMPER-32-3  [SJ_3_PASTE2&3]  51.05,77.47 0 top
JP216  STAND-OFFTIGHT  [STAND-OFF-TIGHT]  40.89,82.55 0 top
JP217  STAND-OFFTIGHT  [STAND-OFF-TIGHT]  51.05,82.55 0 top
JP218  LOGO-SFESK  [SFE-LOGO-FLAME]  60.83,81.79 0 top
JP219  FIDUCIAL1X2  [FIDUCIAL-1X2]  55.37,77.47 0 top
JP220  FIDUCIAL1X2  [FIDUCIAL-1X2]  64.26,83.82 0 top
JP221  [1X06]  55.37,71.12 0 top
JP222  JUMPER-32-3  [SJ_3_PASTE2&3]  66.8,77.47 0 top
JP223  STAND-OFFTIGHT  [STAND-OFF-TIGHT]  56.64,82.55 0 top
JP224  STAND-OFFTIGHT  [STAND-OFF-TIGHT]  66.8,82.55 0 top
JP225  LOGO-SFESK  [SFE-LOGO-FLAME]  76.58,81.79 0 top
JP226  FIDUCIAL1X2  [FIDUCIAL-1X2]  71.12,77.47 0 top
JP227  FIDUCIAL1X2  [FIDUCIAL-1X2]  80.01,83.82 0 top
JP228  [1X06]  71.12,71.12 0 top
JP229  JUMPER-32-3  [SJ_3_PASTE2&3]  82.55,77.47 0 top
JP230  STAND-OFFTIGHT  [STAND-OFF-TIGHT]  72.39,82.55 0 top
JP231  STAND-OFFTIGHT  [STAND-OFF-TIGHT]  82.55,82.55 0 top
JP232  LOGO-SFESK  [SFE-LOGO-FLAME]  92.33,81.79 0 top
JP233  FIDUCIAL1X2  [FIDUCIAL-1X2]  86.87,77.47 0 top
JP234  FIDUCIAL1X2  [FIDUCIAL-1X2]  95.76,83.82 0 top
JP235  [1X06]  86.87,71.12 0 top
JP236  JUMPER-32-3  [SJ_3_PASTE2&3]  98.3,77.47 0 top
JP237  STAND-OFFTIGHT  [STAND-OFF-TIGHT]  88.14,82.55 0 top
JP238  STAND-OFFTIGHT  [STAND-OFF-TIGHT]  98.3,82.55 0 top
JP239  LOGO-SFESK  [SFE-LOGO-FLAME]  108.08,81.79 0 top
JP240  FIDUCIAL1X2  [FIDUCIAL-1X2]  102.62,77.47 0 top
JP241  FIDUCIAL1X2  [FIDUCIAL-1X2]  111.51,83.82 0 top
JP242  [1X06]  102.62,71.12 0 top
JP243  JUMPER-32-3  [SJ_3_PASTE2&3]  114.05,77.47 0 top
JP244  STAND-OFFTIGHT  [STAND-OFF-TIGHT]  103.89,82.55 0 top
JP245  STAND-OFFTIGHT  [STAND-OFF-TIGHT]  114.05,82.55 0 top
JP246  LOGO-SFESK  [SFE-LOGO-FLAME]  13.59,97.54 0 top
JP247  FIDUCIAL1X2  [FIDUCIAL-1X2]  8.13,93.22 0 top
JP248  FIDUCIAL1X2  [FIDUCIAL-1X2]  17.02,99.57 0 top
JP249  [1X06]  8.13,86.87 0 top
JP250  JUMPER-32-3  [SJ_3_PASTE2&3]  19.56,93.22 0 top
JP251  STAND-OFFTIGHT  [STAND-OFF-TIGHT]  9.4,98.3 0 top
JP252  STAND-OFFTIGHT  [STAND-OFF-TIGHT]  19.56,98.3 0 top
JP253  LOGO-SFESK  [SFE-LOGO-FLAME]  29.34,97.54 0 top
JP254  FIDUCIAL1X2  [FIDUCIAL-1X2]  23.88,93.22 0 top
JP255  FIDUCIAL1X2  [FIDUCIAL-1X2]  32.77,99.57 0 top
JP256  [1X06]  23.88,86.87 0 top
JP257  JUMPER-32-3  [SJ_3_PASTE2&3]  35.31,93.22 0 top
JP258  STAND-OFFTIGHT  [STAND-OFF-TIGHT]  25.15,98.3 0 top
JP259  STAND-OFFTIGHT  [STAND-OFF-TIGHT]  35.31,98.3 0 top
JP260  LOGO-SFESK  [SFE-LOGO-FLAME]  45.09,97.54 0 top
JP261  FIDUCIAL1X2  [FIDUCIAL-1X2]  39.62,93.22 0 top
JP262  FIDUCIAL1X2  [FIDUCIAL-1X2]  48.51,99.57 0 top
JP263  [1X06]  39.62,86.87 0 top
JP264  JUMPER-32-3  [SJ_3_PASTE2&3]  51.05,93.22 0 top
JP265  STAND-OFFTIGHT  [STAND-OFF-TIGHT]  40.89,98.3 0 top
JP266  STAND-OFFTIGHT  [STAND-OFF-TIGHT]  51.05,98.3 0 top
JP267  LOGO-SFESK  [SFE-LOGO-FLAME]  60.83,97.54 0 top
JP268  FIDUCIAL1X2  [FIDUCIAL-1X2]  55.37,93.22 0 top
JP269  FIDUCIAL1X2  [FIDUCIAL-1X2]  64.26,99.57 0 top
JP270  [1X06]  55.37,86.87 0 top
JP271  JUMPER-32-3  [SJ_3_PASTE2&3]  66.8,93.22 0 top
JP272  STAND-OFFTIGHT  [STAND-OFF-TIGHT]  56.64,98.3 0 top
JP273  STAND-OFFTIGHT  [STAND-OFF-TIGHT]  66.8,98.3 0 top
JP274  LOGO-SFESK  [SFE-LOGO-FLAME]  76.58,97.54 0 top
JP275  FIDUCIAL1X2  [FIDUCIAL-1X2]  71.12,93.22 0 top
JP276  FIDUCIAL1X2  [FIDUCIAL-1X2]  80.01,99.57 0 top
JP277  [1X06]  71.12,86.87 0 top
JP278  JUMPER-32-3  [SJ_3_PASTE2&3]  82.55,93.22 0 top
JP279  STAND-OFFTIGHT  [STAND-OFF-TIGHT]  72.39,98.3 0 top
JP280  STAND-OFFTIGHT  [STAND-OFF-TIGHT]  82.55,98.3 0 top
JP281  LOGO-SFESK  [SFE-LOGO-FLAME]  92.33,97.54 0 top
JP282  FIDUCIAL1X2  [FIDUCIAL-1X2]  86.87,93.22 0 top
JP283  FIDUCIAL1X2  [FIDUCIAL-1X2]  95.76,99.57 0 top
JP284  [1X06]  86.87,86.87 0 top
JP285  JUMPER-32-3  [SJ_3_PASTE2&3]  98.3,93.22 0 top
JP286  STAND-OFFTIGHT  [STAND-OFF-TIGHT]  88.14,98.3 0 top
JP287  STAND-OFFTIGHT  [STAND-OFF-TIGHT]  98.3,98.3 0 top
JP288  LOGO-SFESK  [SFE-LOGO-FLAME]  108.08,97.54 0 top
JP289  FIDUCIAL1X2  [FIDUCIAL-1X2]  102.62,93.22 0 top
JP290  FIDUCIAL1X2  [FIDUCIAL-1X2]  111.51,99.57 0 top
JP291  [1X06]  102.62,86.87 0 top
JP292  JUMPER-32-3  [SJ_3_PASTE2&3]  114.05,93.22 0 top
JP293  STAND-OFFTIGHT  [STAND-OFF-TIGHT]  103.89,98.3 0 top
JP294  STAND-OFFTIGHT  [STAND-OFF-TIGHT]  114.05,98.3 0 top
JP295  LOGO-SFESK  [SFE-LOGO-FLAME]  13.59,113.28 0 top
JP296  FIDUCIAL1X2  [FIDUCIAL-1X2]  8.13,108.97 0 top
JP297  FIDUCIAL1X2  [FIDUCIAL-1X2]  17.02,115.32 0 top
JP298  [1X06]  8.13,102.62 0 top
JP299  JUMPER-32-3  [SJ_3_PASTE2&3]  19.56,108.97 0 top
JP300  STAND-OFFTIGHT  [STAND-OFF-TIGHT]  9.4,114.05 0 top
JP301  STAND-OFFTIGHT  [STAND-OFF-TIGHT]  19.56,114.05 0 top
JP302  LOGO-SFESK  [SFE-LOGO-FLAME]  29.34,113.28 0 top
JP303  FIDUCIAL1X2  [FIDUCIAL-1X2]  23.88,108.97 0 top
JP304  FIDUCIAL1X2  [FIDUCIAL-1X2]  32.77,115.32 0 top
JP305  [1X06]  23.88,102.62 0 top
JP306  JUMPER-32-3  [SJ_3_PASTE2&3]  35.31,108.97 0 top
JP307  STAND-OFFTIGHT  [STAND-OFF-TIGHT]  25.15,114.05 0 top
JP308  STAND-OFFTIGHT  [STAND-OFF-TIGHT]  35.31,114.05 0 top
JP309  LOGO-SFESK  [SFE-LOGO-FLAME]  45.09,113.28 0 top
JP310  FIDUCIAL1X2  [FIDUCIAL-1X2]  39.62,108.97 0 top
JP311  FIDUCIAL1X2  [FIDUCIAL-1X2]  48.51,115.32 0 top
JP312  [1X06]  39.62,102.62 0 top
JP313  JUMPER-32-3  [SJ_3_PASTE2&3]  51.05,108.97 0 top
JP314  STAND-OFFTIGHT  [STAND-OFF-TIGHT]  40.89,114.05 0 top
JP315  STAND-OFFTIGHT  [STAND-OFF-TIGHT]  51.05,114.05 0 top
JP316  LOGO-SFESK  [SFE-LOGO-FLAME]  60.83,113.28 0 top
JP317  FIDUCIAL1X2  [FIDUCIAL-1X2]  55.37,108.97 0 top
JP318  FIDUCIAL1X2  [FIDUCIAL-1X2]  64.26,115.32 0 top
JP319  [1X06]  55.37,102.62 0 top
JP320  JUMPER-32-3  [SJ_3_PASTE2&3]  66.8,108.97 0 top
JP321  STAND-OFFTIGHT  [STAND-OFF-TIGHT]  56.64,114.05 0 top
JP322  STAND-OFFTIGHT  [STAND-OFF-TIGHT]  66.8,114.05 0 top
JP323  LOGO-SFESK  [SFE-LOGO-FLAME]  76.58,113.28 0 top
JP324  FIDUCIAL1X2  [FIDUCIAL-1X2]  71.12,108.97 0 top
JP325  FIDUCIAL1X2  [FIDUCIAL-1X2]  80.01,115.32 0 top
JP326  [1X06]  71.12,102.62 0 top
JP327  JUMPER-32-3  [SJ_3_PASTE2&3]  82.55,108.97 0 top
JP328  STAND-OFFTIGHT  [STAND-OFF-TIGHT]  72.39,114.05 0 top
JP329  STAND-OFFTIGHT  [STAND-OFF-TIGHT]  82.55,114.05 0 top
JP330  LOGO-SFESK  [SFE-LOGO-FLAME]  92.33,113.28 0 top
JP331  FIDUCIAL1X2  [FIDUCIAL-1X2]  86.87,108.97 0 top
JP332  FIDUCIAL1X2  [FIDUCIAL-1X2]  95.76,115.32 0 top
JP333  [1X06]  86.87,102.62 0 top
JP334  JUMPER-32-3  [SJ_3_PASTE2&3]  98.3,108.97 0 top
JP335  STAND-OFFTIGHT  [STAND-OFF-TIGHT]  88.14,114.05 0 top
JP336  STAND-OFFTIGHT  [STAND-OFF-TIGHT]  98.3,114.05 0 top
JP337  LOGO-SFESK  [SFE-LOGO-FLAME]  108.08,113.28 0 top
JP338  FIDUCIAL1X2  [FIDUCIAL-1X2]  102.62,108.97 0 top
JP339  FIDUCIAL1X2  [FIDUCIAL-1X2]  111.51,115.32 0 top
JP340  [1X06]  102.62,102.62 0 top
JP341  JUMPER-32-3  [SJ_3_PASTE2&3]  114.05,108.97 0 top
JP342  STAND-OFFTIGHT  [STAND-OFF-TIGHT]  103.89,114.05 0 top
JP343  STAND-OFFTIGHT  [STAND-OFF-TIGHT]  114.05,114.05 0 top
JP344  LOGO-SFESK  [SFE-LOGO-FLAME]  137.54,18.8 0 top
JP345  FIDUCIAL1X2  [FIDUCIAL-1X2]  132.08,14.48 0 top
JP346  FIDUCIAL1X2  [FIDUCIAL-1X2]  140.97,20.83 0 top
JP347  [1X06]  132.08,8.13 0 top
JP348  JUMPER-32-3  [SJ_3_PASTE2&3]  143.51,14.48 0 top
JP349  STAND-OFFTIGHT  [STAND-OFF-TIGHT]  133.35,19.56 0 top
JP350  STAND-OFFTIGHT  [STAND-OFF-TIGHT]  143.51,19.56 0 top
JP351  LOGO-SFESK  [SFE-LOGO-FLAME]  153.29,18.8 0 top
JP352  FIDUCIAL1X2  [FIDUCIAL-1X2]  147.83,14.48 0 top
JP353  FIDUCIAL1X2  [FIDUCIAL-1X2]  156.72,20.83 0 top
JP354  [1X06]  147.83,8.13 0 top
JP355  JUMPER-32-3  [SJ_3_PASTE2&3]  159.26,14.48 0 top
JP356  STAND-OFFTIGHT  [STAND-OFF-TIGHT]  149.1,19.56 0 top
JP357  STAND-OFFTIGHT  [STAND-OFF-TIGHT]  159.26,19.56 0 top
JP358  LOGO-SFESK  [SFE-LOGO-FLAME]  169.04,18.8 0 top
JP359  FIDUCIAL1X2  [FIDUCIAL-1X2]  163.58,14.48 0 top
JP360  FIDUCIAL1X2  [FIDUCIAL-1X2]  172.47,20.83 0 top
JP361  [1X06]  163.58,8.13 0 top
JP362  JUMPER-32-3  [SJ_3_PASTE2&3]  175.01,14.48 0 top
JP363  STAND-OFFTIGHT  [STAND-OFF-TIGHT]  164.85,19.56 0 top
JP364  STAND-OFFTIGHT  [STAND-OFF-TIGHT]  175.01,19.56 0 top
JP365  LOGO-SFESK  [SFE-LOGO-FLAME]  184.78,18.8 0 top
JP366  FIDUCIAL1X2  [FIDUCIAL-1X2]  179.32,14.48 0 top
JP367  FIDUCIAL1X2  [FIDUCIAL-1X2]  188.21,20.83 0 top
JP368  [1X06]  179.32,8.13 0 top
JP369  JUMPER-32-3  [SJ_3_PASTE2&3]  190.75,14.48 0 top
JP370  STAND-OFFTIGHT  [STAND-OFF-TIGHT]  180.59,19.56 0 top
JP371  STAND-OFFTIGHT  [STAND-OFF-TIGHT]  190.75,19.56 0 top
JP372  LOGO-SFESK  [SFE-LOGO-FLAME]  200.53,18.8 0 top
JP373  FIDUCIAL1X2  [FIDUCIAL-1X2]  195.07,14.48 0 top
JP374  FIDUCIAL1X2  [FIDUCIAL-1X2]  203.96,20.83 0 top
JP375  [1X06]  195.07,8.13 0 top
JP376  JUMPER-32-3  [SJ_3_PASTE2&3]  206.5,14.48 0 top
JP377  STAND-OFFTIGHT  [STAND-OFF-TIGHT]  196.34,19.56 0 top
JP378  STAND-OFFTIGHT  [STAND-OFF-TIGHT]  206.5,19.56 0 top
JP379  LOGO-SFESK  [SFE-LOGO-FLAME]  216.28,18.8 0 top
JP380  FIDUCIAL1X2  [FIDUCIAL-1X2]  210.82,14.48 0 top
JP381  FIDUCIAL1X2  [FIDUCIAL-1X2]  219.71,20.83 0 top
JP382  [1X06]  210.82,8.13 0 top
JP383  JUMPER-32-3  [SJ_3_PASTE2&3]  222.25,14.48 0 top
JP384  STAND-OFFTIGHT  [STAND-OFF-TIGHT]  212.09,19.56 0 top
JP385  STAND-OFFTIGHT  [STAND-OFF-TIGHT]  222.25,19.56 0 top
JP386  LOGO-SFESK  [SFE-LOGO-FLAME]  232.03,18.8 0 top
JP387  FIDUCIAL1X2  [FIDUCIAL-1X2]  226.57,14.48 0 top
JP388  FIDUCIAL1X2  [FIDUCIAL-1X2]  235.46,20.83 0 top
JP389  [1X06]  226.57,8.13 0 top
JP390  JUMPER-32-3  [SJ_3_PASTE2&3]  238,14.48 0 top
JP391  STAND-OFFTIGHT  [STAND-OFF-TIGHT]  227.84,19.56 0 top
JP392  STAND-OFFTIGHT  [STAND-OFF-TIGHT]  238,19.56 0 top
JP393  LOGO-SFESK  [SFE-LOGO-FLAME]  137.54,34.54 0 top
JP394  FIDUCIAL1X2  [FIDUCIAL-1X2]  132.08,30.23 0 top
JP395  FIDUCIAL1X2  [FIDUCIAL-1X2]  140.97,36.58 0 top
JP396  [1X06]  132.08,23.88 0 top
JP397  JUMPER-32-3  [SJ_3_PASTE2&3]  143.51,30.23 0 top
JP398  STAND-OFFTIGHT  [STAND-OFF-TIGHT]  133.35,35.31 0 top
JP399  STAND-OFFTIGHT  [STAND-OFF-TIGHT]  143.51,35.31 0 top
JP400  LOGO-SFESK  [SFE-LOGO-FLAME]  153.29,34.54 0 top
JP401  FIDUCIAL1X2  [FIDUCIAL-1X2]  147.83,30.23 0 top
JP402  FIDUCIAL1X2  [FIDUCIAL-1X2]  156.72,36.58 0 top
JP403  [1X06]  147.83,23.88 0 top
JP404  JUMPER-32-3  [SJ_3_PASTE2&3]  159.26,30.23 0 top
JP405  STAND-OFFTIGHT  [STAND-OFF-TIGHT]  149.1,35.31 0 top
JP406  STAND-OFFTIGHT  [STAND-OFF-TIGHT]  159.26,35.31 0 top
JP407  LOGO-SFESK  [SFE-LOGO-FLAME]  169.04,34.54 0 top
JP408  FIDUCIAL1X2  [FIDUCIAL-1X2]  163.58,30.23 0 top
JP409  FIDUCIAL1X2  [FIDUCIAL-1X2]  172.47,36.58 0 top
JP410  [1X06]  163.58,23.88 0 top
JP411  JUMPER-32-3  [SJ_3_PASTE2&3]  175.01,30.23 0 top
JP412  STAND-OFFTIGHT  [STAND-OFF-TIGHT]  164.85,35.31 0 top
JP413  STAND-OFFTIGHT  [STAND-OFF-TIGHT]  175.01,35.31 0 top
JP414  LOGO-SFESK  [SFE-LOGO-FLAME]  184.78,34.54 0 top
JP415  FIDUCIAL1X2  [FIDUCIAL-1X2]  179.32,30.23 0 top
JP416  FIDUCIAL1X2  [FIDUCIAL-1X2]  188.21,36.58 0 top
JP417  [1X06]  179.32,23.88 0 top
JP418  JUMPER-32-3  [SJ_3_PASTE2&3]  190.75,30.23 0 top
JP419  STAND-OFFTIGHT  [STAND-OFF-TIGHT]  180.59,35.31 0 top
JP420  STAND-OFFTIGHT  [STAND-OFF-TIGHT]  190.75,35.31 0 top
JP421  LOGO-SFESK  [SFE-LOGO-FLAME]  200.53,34.54 0 top
JP422  FIDUCIAL1X2  [FIDUCIAL-1X2]  195.07,30.23 0 top
JP423  FIDUCIAL1X2  [FIDUCIAL-1X2]  203.96,36.58 0 top
JP424  [1X06]  195.07,23.88 0 top
JP425  JUMPER-32-3  [SJ_3_PASTE2&3]  206.5,30.23 0 top
JP426  STAND-OFFTIGHT  [STAND-OFF-TIGHT]  196.34,35.31 0 top
JP427  STAND-OFFTIGHT  [STAND-OFF-TIGHT]  206.5,35.31 0 top
JP428  LOGO-SFESK  [SFE-LOGO-FLAME]  216.28,34.54 0 top
JP429  FIDUCIAL1X2  [FIDUCIAL-1X2]  210.82,30.23 0 top
JP430  FIDUCIAL1X2  [FIDUCIAL-1X2]  219.71,36.58 0 top
JP431  [1X06]  210.82,23.88 0 top
JP432  JUMPER-32-3  [SJ_3_PASTE2&3]  222.25,30.23 0 top
JP433  STAND-OFFTIGHT  [STAND-OFF-TIGHT]  212.09,35.31 0 top
JP434  STAND-OFFTIGHT  [STAND-OFF-TIGHT]  222.25,35.31 0 top
JP435  LOGO-SFESK  [SFE-LOGO-FLAME]  232.03,34.54 0 top
JP436  FIDUCIAL1X2  [FIDUCIAL-1X2]  226.57,30.23 0 top
JP437  FIDUCIAL1X2  [FIDUCIAL-1X2]  235.46,36.58 0 top
JP438  [1X06]  226.57,23.88 0 top
JP439  JUMPER-32-3  [SJ_3_PASTE2&3]  238,30.23 0 top
JP440  STAND-OFFTIGHT  [STAND-OFF-TIGHT]  227.84,35.31 0 top
JP441  STAND-OFFTIGHT  [STAND-OFF-TIGHT]  238,35.31 0 top
JP442  LOGO-SFESK  [SFE-LOGO-FLAME]  137.54,50.29 0 top
JP443  FIDUCIAL1X2  [FIDUCIAL-1X2]  132.08,45.97 0 top
JP444  FIDUCIAL1X2  [FIDUCIAL-1X2]  140.97,52.32 0 top
JP445  [1X06]  132.08,39.62 0 top
JP446  JUMPER-32-3  [SJ_3_PASTE2&3]  143.51,45.97 0 top
JP447  STAND-OFFTIGHT  [STAND-OFF-TIGHT]  133.35,51.05 0 top
JP448  STAND-OFFTIGHT  [STAND-OFF-TIGHT]  143.51,51.05 0 top
JP449  LOGO-SFESK  [SFE-LOGO-FLAME]  153.29,50.29 0 top
JP450  FIDUCIAL1X2  [FIDUCIAL-1X2]  147.83,45.97 0 top
JP451  FIDUCIAL1X2  [FIDUCIAL-1X2]  156.72,52.32 0 top
JP452  [1X06]  147.83,39.62 0 top
JP453  JUMPER-32-3  [SJ_3_PASTE2&3]  159.26,45.97 0 top
JP454  STAND-OFFTIGHT  [STAND-OFF-TIGHT]  149.1,51.05 0 top
JP455  STAND-OFFTIGHT  [STAND-OFF-TIGHT]  159.26,51.05 0 top
JP456  LOGO-SFESK  [SFE-LOGO-FLAME]  169.04,50.29 0 top
JP457  FIDUCIAL1X2  [FIDUCIAL-1X2]  163.58,45.97 0 top
JP458  FIDUCIAL1X2  [FIDUCIAL-1X2]  172.47,52.32 0 top
JP459  [1X06]  163.58,39.62 0 top
JP460  JUMPER-32-3  [SJ_3_PASTE2&3]  175.01,45.97 0 top
JP461  STAND-OFFTIGHT  [STAND-OFF-TIGHT]  164.85,51.05 0 top
JP462  STAND-OFFTIGHT  [STAND-OFF-TIGHT]  175.01,51.05 0 top
JP463  LOGO-SFESK  [SFE-LOGO-FLAME]  184.78,50.29 0 top
JP464  FIDUCIAL1X2  [FIDUCIAL-1X2]  179.32,45.97 0 top
JP465  FIDUCIAL1X2  [FIDUCIAL-1X2]  188.21,52.32 0 top
JP466  [1X06]  179.32,39.62 0 top
JP467  JUMPER-32-3  [SJ_3_PASTE2&3]  190.75,45.97 0 top
JP468  STAND-OFFTIGHT  [STAND-OFF-TIGHT]  180.59,51.05 0 top
JP469  STAND-OFFTIGHT  [STAND-OFF-TIGHT]  190.75,51.05 0 top
JP470  LOGO-SFESK  [SFE-LOGO-FLAME]  200.53,50.29 0 top
JP471  FIDUCIAL1X2  [FIDUCIAL-1X2]  195.07,45.97 0 top
JP472  FIDUCIAL1X2  [FIDUCIAL-1X2]  203.96,52.32 0 top
JP473  [1X06]  195.07,39.62 0 top
JP474  JUMPER-32-3  [SJ_3_PASTE2&3]  206.5,45.97 0 top
JP475  STAND-OFFTIGHT  [STAND-OFF-TIGHT]  196.34,51.05 0 top
JP476  STAND-OFFTIGHT  [STAND-OFF-TIGHT]  206.5,51.05 0 top
JP477  LOGO-SFESK  [SFE-LOGO-FLAME]  216.28,50.29 0 top
JP478  FIDUCIAL1X2  [FIDUCIAL-1X2]  210.82,45.97 0 top
JP479  FIDUCIAL1X2  [FIDUCIAL-1X2]  219.71,52.32 0 top
JP480  [1X06]  210.82,39.62 0 top
JP481  JUMPER-32-3  [SJ_3_PASTE2&3]  222.25,45.97 0 top
JP482  STAND-OFFTIGHT  [STAND-OFF-TIGHT]  212.09,51.05 0 top
JP483  STAND-OFFTIGHT  [STAND-OFF-TIGHT]  222.25,51.05 0 top
JP484  LOGO-SFESK  [SFE-LOGO-FLAME]  232.03,50.29 0 top
JP485  FIDUCIAL1X2  [FIDUCIAL-1X2]  226.57,45.97 0 top
JP486  FIDUCIAL1X2  [FIDUCIAL-1X2]  235.46,52.32 0 top
JP487  [1X06]  226.57,39.62 0 top
JP488  JUMPER-32-3  [SJ_3_PASTE2&3]  238,45.97 0 top
JP489  STAND-OFFTIGHT  [STAND-OFF-TIGHT]  227.84,51.05 0 top
JP490  STAND-OFFTIGHT  [STAND-OFF-TIGHT]  238,51.05 0 top
JP491  LOGO-SFESK  [SFE-LOGO-FLAME]  137.54,66.04 0 top
JP492  FIDUCIAL1X2  [FIDUCIAL-1X2]  132.08,61.72 0 top
JP493  FIDUCIAL1X2  [FIDUCIAL-1X2]  140.97,68.07 0 top
JP494  [1X06]  132.08,55.37 0 top
JP495  JUMPER-32-3  [SJ_3_PASTE2&3]  143.51,61.72 0 top
JP496  STAND-OFFTIGHT  [STAND-OFF-TIGHT]  133.35,66.8 0 top
JP497  STAND-OFFTIGHT  [STAND-OFF-TIGHT]  143.51,66.8 0 top
JP498  LOGO-SFESK  [SFE-LOGO-FLAME]  153.29,66.04 0 top
JP499  FIDUCIAL1X2  [FIDUCIAL-1X2]  147.83,61.72 0 top
JP500  FIDUCIAL1X2  [FIDUCIAL-1X2]  156.72,68.07 0 top
JP501  [1X06]  147.83,55.37 0 top
JP502  JUMPER-32-3  [SJ_3_PASTE2&3]  159.26,61.72 0 top
JP503  STAND-OFFTIGHT  [STAND-OFF-TIGHT]  149.1,66.8 0 top
JP504  STAND-OFFTIGHT  [STAND-OFF-TIGHT]  159.26,66.8 0 top
JP505  LOGO-SFESK  [SFE-LOGO-FLAME]  169.04,66.04 0 top
JP506  FIDUCIAL1X2  [FIDUCIAL-1X2]  163.58,61.72 0 top
JP507  FIDUCIAL1X2  [FIDUCIAL-1X2]  172.47,68.07 0 top
JP508  [1X06]  163.58,55.37 0 top
JP509  JUMPER-32-3  [SJ_3_PASTE2&3]  175.01,61.72 0 top
JP510  STAND-OFFTIGHT  [STAND-OFF-TIGHT]  164.85,66.8 0 top
JP511  STAND-OFFTIGHT  [STAND-OFF-TIGHT]  175.01,66.8 0 top
JP512  LOGO-SFESK  [SFE-LOGO-FLAME]  184.78,66.04 0 top
JP513  FIDUCIAL1X2  [FIDUCIAL-1X2]  179.32,61.72 0 top
JP514  FIDUCIAL1X2  [FIDUCIAL-1X2]  188.21,68.07 0 top
JP515  [1X06]  179.32,55.37 0 top
JP516  JUMPER-32-3  [SJ_3_PASTE2&3]  190.75,61.72 0 top
JP517  STAND-OFFTIGHT  [STAND-OFF-TIGHT]  180.59,66.8 0 top
JP518  STAND-OFFTIGHT  [STAND-OFF-TIGHT]  190.75,66.8 0 top
JP519  LOGO-SFESK  [SFE-LOGO-FLAME]  200.53,66.04 0 top
JP520  FIDUCIAL1X2  [FIDUCIAL-1X2]  195.07,61.72 0 top
JP521  FIDUCIAL1X2  [FIDUCIAL-1X2]  203.96,68.07 0 top
JP522  [1X06]  195.07,55.37 0 top
JP523  JUMPER-32-3  [SJ_3_PASTE2&3]  206.5,61.72 0 top
JP524  STAND-OFFTIGHT  [STAND-OFF-TIGHT]  196.34,66.8 0 top
JP525  STAND-OFFTIGHT  [STAND-OFF-TIGHT]  206.5,66.8 0 top
JP526  LOGO-SFESK  [SFE-LOGO-FLAME]  216.28,66.04 0 top
JP527  FIDUCIAL1X2  [FIDUCIAL-1X2]  210.82,61.72 0 top
JP528  FIDUCIAL1X2  [FIDUCIAL-1X2]  219.71,68.07 0 top
JP529  [1X06]  210.82,55.37 0 top
JP530  JUMPER-32-3  [SJ_3_PASTE2&3]  222.25,61.72 0 top
JP531  STAND-OFFTIGHT  [STAND-OFF-TIGHT]  212.09,66.8 0 top
JP532  STAND-OFFTIGHT  [STAND-OFF-TIGHT]  222.25,66.8 0 top
JP533  LOGO-SFESK  [SFE-LOGO-FLAME]  232.03,66.04 0 top
JP534  FIDUCIAL1X2  [FIDUCIAL-1X2]  226.57,61.72 0 top
JP535  FIDUCIAL1X2  [FIDUCIAL-1X2]  235.46,68.07 0 top
JP536  [1X06]  226.57,55.37 0 top
JP537  JUMPER-32-3  [SJ_3_PASTE2&3]  238,61.72 0 top
JP538  STAND-OFFTIGHT  [STAND-OFF-TIGHT]  227.84,66.8 0 top
JP539  STAND-OFFTIGHT  [STAND-OFF-TIGHT]  238,66.8 0 top
JP540  LOGO-SFESK  [SFE-LOGO-FLAME]  137.54,81.79 0 top
JP541  FIDUCIAL1X2  [FIDUCIAL-1X2]  132.08,77.47 0 top
JP542  FIDUCIAL1X2  [FIDUCIAL-1X2]  140.97,83.82 0 top
JP543  [1X06]  132.08,71.12 0 top
JP544  JUMPER-32-3  [SJ_3_PASTE2&3]  143.51,77.47 0 top
JP545  STAND-OFFTIGHT  [STAND-OFF-TIGHT]  133.35,82.55 0 top
JP546  STAND-OFFTIGHT  [STAND-OFF-TIGHT]  143.51,82.55 0 top
JP547  LOGO-SFESK  [SFE-LOGO-FLAME]  153.29,81.79 0 top
JP548  FIDUCIAL1X2  [FIDUCIAL-1X2]  147.83,77.47 0 top
JP549  FIDUCIAL1X2  [FIDUCIAL-1X2]  156.72,83.82 0 top
JP550  [1X06]  147.83,71.12 0 top
JP551  JUMPER-32-3  [SJ_3_PASTE2&3]  159.26,77.47 0 top
JP552  STAND-OFFTIGHT  [STAND-OFF-TIGHT]  149.1,82.55 0 top
JP553  STAND-OFFTIGHT  [STAND-OFF-TIGHT]  159.26,82.55 0 top
JP554  LOGO-SFESK  [SFE-LOGO-FLAME]  169.04,81.79 0 top
JP555  FIDUCIAL1X2  [FIDUCIAL-1X2]  163.58,77.47 0 top
JP556  FIDUCIAL1X2  [FIDUCIAL-1X2]  172.47,83.82 0 top
JP557  [1X06]  163.58,71.12 0 top
JP558  JUMPER-32-3  [SJ_3_PASTE2&3]  175.01,77.47 0 top
JP559  STAND-OFFTIGHT  [STAND-OFF-TIGHT]  164.85,82.55 0 top
JP560  STAND-OFFTIGHT  [STAND-OFF-TIGHT]  175.01,82.55 0 top
JP561  LOGO-SFESK  [SFE-LOGO-FLAME]  184.78,81.79 0 top
JP562  FIDUCIAL1X2  [FIDUCIAL-1X2]  179.32,77.47 0 top
JP563  FIDUCIAL1X2  [FIDUCIAL-1X2]  188.21,83.82 0 top
JP564  [1X06]  179.32,71.12 0 top
JP565  JUMPER-32-3  [SJ_3_PASTE2&3]  190.75,77.47 0 top
JP566  STAND-OFFTIGHT  [STAND-OFF-TIGHT]  180.59,82.55 0 top
JP567  STAND-OFFTIGHT  [STAND-OFF-TIGHT]  190.75,82.55 0 top
JP568  LOGO-SFESK  [SFE-LOGO-FLAME]  200.53,81.79 0 top
JP569  FIDUCIAL1X2  [FIDUCIAL-1X2]  195.07,77.47 0 top
JP570  FIDUCIAL1X2  [FIDUCIAL-1X2]  203.96,83.82 0 top
JP571  [1X06]  195.07,71.12 0 top
JP572  JUMPER-32-3  [SJ_3_PASTE2&3]  206.5,77.47 0 top
JP573  STAND-OFFTIGHT  [STAND-OFF-TIGHT]  196.34,82.55 0 top
JP574  STAND-OFFTIGHT  [STAND-OFF-TIGHT]  206.5,82.55 0 top
JP575  LOGO-SFESK  [SFE-LOGO-FLAME]  216.28,81.79 0 top
JP576  FIDUCIAL1X2  [FIDUCIAL-1X2]  210.82,77.47 0 top
JP577  FIDUCIAL1X2  [FIDUCIAL-1X2]  219.71,83.82 0 top
JP578  [1X06]  210.82,71.12 0 top
JP579  JUMPER-32-3  [SJ_3_PASTE2&3]  222.25,77.47 0 top
JP580  STAND-OFFTIGHT  [STAND-OFF-TIGHT]  212.09,82.55 0 top
JP581  STAND-OFFTIGHT  [STAND-OFF-TIGHT]  222.25,82.55 0 top
JP582  LOGO-SFESK  [SFE-LOGO-FLAME]  232.03,81.79 0 top
JP583  FIDUCIAL1X2  [FIDUCIAL-1X2]  226.57,77.47 0 top
JP584  FIDUCIAL1X2  [FIDUCIAL-1X2]  235.46,83.82 0 top
JP585  [1X06]  226.57,71.12 0 top
JP586  JUMPER-32-3  [SJ_3_PASTE2&3]  238,77.47 0 top
JP587  STAND-OFFTIGHT  [STAND-OFF-TIGHT]  227.84,82.55 0 top
JP588  STAND-OFFTIGHT  [STAND-OFF-TIGHT]  238,82.55 0 top
JP589  LOGO-SFESK  [SFE-LOGO-FLAME]  137.54,97.54 0 top
JP590  FIDUCIAL1X2  [FIDUCIAL-1X2]  132.08,93.22 0 top
JP591  FIDUCIAL1X2  [FIDUCIAL-1X2]  140.97,99.57 0 top
JP592  [1X06]  132.08,86.87 0 top
JP593  JUMPER-32-3  [SJ_3_PASTE2&3]  143.51,93.22 0 top
JP594  STAND-OFFTIGHT  [STAND-OFF-TIGHT]  133.35,98.3 0 top
JP595  STAND-OFFTIGHT  [STAND-OFF-TIGHT]  143.51,98.3 0 top
JP596  LOGO-SFESK  [SFE-LOGO-FLAME]  153.29,97.54 0 top
JP597  FIDUCIAL1X2  [FIDUCIAL-1X2]  147.83,93.22 0 top
JP598  FIDUCIAL1X2  [FIDUCIAL-1X2]  156.72,99.57 0 top
JP599  [1X06]  147.83,86.87 0 top
JP600  JUMPER-32-3  [SJ_3_PASTE2&3]  159.26,93.22 0 top
JP601  STAND-OFFTIGHT  [STAND-OFF-TIGHT]  149.1,98.3 0 top
JP602  STAND-OFFTIGHT  [STAND-OFF-TIGHT]  159.26,98.3 0 top
JP603  LOGO-SFESK  [SFE-LOGO-FLAME]  169.04,97.54 0 top
JP604  FIDUCIAL1X2  [FIDUCIAL-1X2]  163.58,93.22 0 top
JP605  FIDUCIAL1X2  [FIDUCIAL-1X2]  172.47,99.57 0 top
JP606  [1X06]  163.58,86.87 0 top
JP607  JUMPER-32-3  [SJ_3_PASTE2&3]  175.01,93.22 0 top
JP608  STAND-OFFTIGHT  [STAND-OFF-TIGHT]  164.85,98.3 0 top
JP609  STAND-OFFTIGHT  [STAND-OFF-TIGHT]  175.01,98.3 0 top
JP610  LOGO-SFESK  [SFE-LOGO-FLAME]  184.78,97.54 0 top
JP611  FIDUCIAL1X2  [FIDUCIAL-1X2]  179.32,93.22 0 top
JP612  FIDUCIAL1X2  [FIDUCIAL-1X2]  188.21,99.57 0 top
JP613  [1X06]  179.32,86.87 0 top
JP614  JUMPER-32-3  [SJ_3_PASTE2&3]  190.75,93.22 0 top
JP615  STAND-OFFTIGHT  [STAND-OFF-TIGHT]  180.59,98.3 0 top
JP616  STAND-OFFTIGHT  [STAND-OFF-TIGHT]  190.75,98.3 0 top
JP617  LOGO-SFESK  [SFE-LOGO-FLAME]  200.53,97.54 0 top
JP618  FIDUCIAL1X2  [FIDUCIAL-1X2]  195.07,93.22 0 top
JP619  FIDUCIAL1X2  [FIDUCIAL-1X2]  203.96,99.57 0 top
JP620  [1X06]  195.07,86.87 0 top
JP621  JUMPER-32-3  [SJ_3_PASTE2&3]  206.5,93.22 0 top
JP622  STAND-OFFTIGHT  [STAND-OFF-TIGHT]  196.34,98.3 0 top
JP623  STAND-OFFTIGHT  [STAND-OFF-TIGHT]  206.5,98.3 0 top
JP624  LOGO-SFESK  [SFE-LOGO-FLAME]  216.28,97.54 0 top
JP625  FIDUCIAL1X2  [FIDUCIAL-1X2]  210.82,93.22 0 top
JP626  FIDUCIAL1X2  [FIDUCIAL-1X2]  219.71,99.57 0 top
JP627  [1X06]  210.82,86.87 0 top
JP628  JUMPER-32-3  [SJ_3_PASTE2&3]  222.25,93.22 0 top
JP629  STAND-OFFTIGHT  [STAND-OFF-TIGHT]  212.09,98.3 0 top
JP630  STAND-OFFTIGHT  [STAND-OFF-TIGHT]  222.25,98.3 0 top
JP631  LOGO-SFESK  [SFE-LOGO-FLAME]  232.03,97.54 0 top
JP632  FIDUCIAL1X2  [FIDUCIAL-1X2]  226.57,93.22 0 top
JP633  FIDUCIAL1X2  [FIDUCIAL-1X2]  235.46,99.57 0 top
JP634  [1X06]  226.57,86.87 0 top
JP635  JUMPER-32-3  [SJ_3_PASTE2&3]  238,93.22 0 top
JP636  STAND-OFFTIGHT  [STAND-OFF-TIGHT]  227.84,98.3 0 top
JP637  STAND-OFFTIGHT  [STAND-OFF-TIGHT]  238,98.3 0 top
JP638  LOGO-SFESK  [SFE-LOGO-FLAME]  137.54,113.28 0 top
JP639  FIDUCIAL1X2  [FIDUCIAL-1X2]  132.08,108.97 0 top
JP640  FIDUCIAL1X2  [FIDUCIAL-1X2]  140.97,115.32 0 top
JP641  [1X06]  132.08,102.62 0 top
JP642  JUMPER-32-3  [SJ_3_PASTE2&3]  143.51,108.97 0 top
JP643  STAND-OFFTIGHT  [STAND-OFF-TIGHT]  133.35,114.05 0 top
JP644  STAND-OFFTIGHT  [STAND-OFF-TIGHT]  143.51,114.05 0 top
JP645  LOGO-SFESK  [SFE-LOGO-FLAME]  153.29,113.28 0 top
JP646  FIDUCIAL1X2  [FIDUCIAL-1X2]  147.83,108.97 0 top
JP647  FIDUCIAL1X2  [FIDUCIAL-1X2]  156.72,115.32 0 top
JP648  [1X06]  147.83,102.62 0 top
JP649  JUMPER-32-3  [SJ_3_PASTE2&3]  159.26,108.97 0 top
JP650  STAND-OFFTIGHT  [STAND-OFF-TIGHT]  149.1,114.05 0 top
JP651  STAND-OFFTIGHT  [STAND-OFF-TIGHT]  159.26,114.05 0 top
JP652  LOGO-SFESK  [SFE-LOGO-FLAME]  169.04,113.28 0 top
JP653  FIDUCIAL1X2  [FIDUCIAL-1X2]  163.58,108.97 0 top
JP654  FIDUCIAL1X2  [FIDUCIAL-1X2]  172.47,115.32 0 top
JP655  [1X06]  163.58,102.62 0 top
JP656  JUMPER-32-3  [SJ_3_PASTE2&3]  175.01,108.97 0 top
JP657  STAND-OFFTIGHT  [STAND-OFF-TIGHT]  164.85,114.05 0 top
JP658  STAND-OFFTIGHT  [STAND-OFF-TIGHT]  175.01,114.05 0 top
JP659  LOGO-SFESK  [SFE-LOGO-FLAME]  184.78,113.28 0 top
JP660  FIDUCIAL1X2  [FIDUCIAL-1X2]  179.32,108.97 0 top
JP661  FIDUCIAL1X2  [FIDUCIAL-1X2]  188.21,115.32 0 top
JP662  [1X06]  179.32,102.62 0 top
JP663  JUMPER-32-3  [SJ_3_PASTE2&3]  190.75,108.97 0 top
JP664  STAND-OFFTIGHT  [STAND-OFF-TIGHT]  180.59,114.05 0 top
JP665  STAND-OFFTIGHT  [STAND-OFF-TIGHT]  190.75,114.05 0 top
JP666  LOGO-SFESK  [SFE-LOGO-FLAME]  200.53,113.28 0 top
JP667  FIDUCIAL1X2  [FIDUCIAL-1X2]  195.07,108.97 0 top
JP668  FIDUCIAL1X2  [FIDUCIAL-1X2]  203.96,115.32 0 top
JP669  [1X06]  195.07,102.62 0 top
JP670  JUMPER-32-3  [SJ_3_PASTE2&3]  206.5,108.97 0 top
JP671  STAND-OFFTIGHT  [STAND-OFF-TIGHT]  196.34,114.05 0 top
JP672  STAND-OFFTIGHT  [STAND-OFF-TIGHT]  206.5,114.05 0 top
JP673  LOGO-SFESK  [SFE-LOGO-FLAME]  216.28,113.28 0 top
JP674  FIDUCIAL1X2  [FIDUCIAL-1X2]  210.82,108.97 0 top
JP675  FIDUCIAL1X2  [FIDUCIAL-1X2]  219.71,115.32 0 top
JP676  [1X06]  210.82,102.62 0 top
JP677  JUMPER-32-3  [SJ_3_PASTE2&3]  222.25,108.97 0 top
JP678  STAND-OFFTIGHT  [STAND-OFF-TIGHT]  212.09,114.05 0 top
JP679  STAND-OFFTIGHT  [STAND-OFF-TIGHT]  222.25,114.05 0 top
JP680  LOGO-SFESK  [SFE-LOGO-FLAME]  232.03,113.28 0 top
JP681  FIDUCIAL1X2  [FIDUCIAL-1X2]  226.57,108.97 0 top
JP682  FIDUCIAL1X2  [FIDUCIAL-1X2]  235.46,115.32 0 top
JP683  [1X06]  226.57,102.62 0 top
JP684  JUMPER-32-3  [SJ_3_PASTE2&3]  238,108.97 0 top
JP685  STAND-OFFTIGHT  [STAND-OFF-TIGHT]  227.84,114.05 0 top
JP686  STAND-OFFTIGHT  [STAND-OFF-TIGHT]  238,114.05 0 top
JP687  LOGO-SFESK  [SFE-LOGO-FLAME]  13.59,142.75 0 top
JP688  FIDUCIAL1X2  [FIDUCIAL-1X2]  8.13,138.43 0 top
JP689  FIDUCIAL1X2  [FIDUCIAL-1X2]  17.02,144.78 0 top
JP690  [1X06]  8.13,132.08 0 top
JP691  JUMPER-32-3  [SJ_3_PASTE2&3]  19.56,138.43 0 top
JP692  STAND-OFFTIGHT  [STAND-OFF-TIGHT]  9.4,143.51 0 top
JP693  STAND-OFFTIGHT  [STAND-OFF-TIGHT]  19.56,143.51 0 top
JP694  LOGO-SFESK  [SFE-LOGO-FLAME]  29.34,142.75 0 top
JP695  FIDUCIAL1X2  [FIDUCIAL-1X2]  23.88,138.43 0 top
JP696  FIDUCIAL1X2  [FIDUCIAL-1X2]  32.77,144.78 0 top
JP697  [1X06]  23.88,132.08 0 top
JP698  JUMPER-32-3  [SJ_3_PASTE2&3]  35.31,138.43 0 top
JP699  STAND-OFFTIGHT  [STAND-OFF-TIGHT]  25.15,143.51 0 top
JP700  STAND-OFFTIGHT  [STAND-OFF-TIGHT]  35.31,143.51 0 top
JP701  LOGO-SFESK  [SFE-LOGO-FLAME]  45.09,142.75 0 top
JP702  FIDUCIAL1X2  [FIDUCIAL-1X2]  39.62,138.43 0 top
JP703  FIDUCIAL1X2  [FIDUCIAL-1X2]  48.51,144.78 0 top
JP704  [1X06]  39.62,132.08 0 top
JP705  JUMPER-32-3  [SJ_3_PASTE2&3]  51.05,138.43 0 top
JP706  STAND-OFFTIGHT  [STAND-OFF-TIGHT]  40.89,143.51 0 top
JP707  STAND-OFFTIGHT  [STAND-OFF-TIGHT]  51.05,143.51 0 top
JP708  LOGO-SFESK  [SFE-LOGO-FLAME]  60.83,142.75 0 top
JP709  FIDUCIAL1X2  [FIDUCIAL-1X2]  55.37,138.43 0 top
JP710  FIDUCIAL1X2  [FIDUCIAL-1X2]  64.26,144.78 0 top
JP711  [1X06]  55.37,132.08 0 top
JP712  JUMPER-32-3  [SJ_3_PASTE2&3]  66.8,138.43 0 top
JP713  STAND-OFFTIGHT  [STAND-OFF-TIGHT]  56.64,143.51 0 top
JP714  STAND-OFFTIGHT  [STAND-OFF-TIGHT]  66.8,143.51 0 top
JP715  LOGO-SFESK  [SFE-LOGO-FLAME]  76.58,142.75 0 top
JP716  FIDUCIAL1X2  [FIDUCIAL-1X2]  71.12,138.43 0 top
JP717  FIDUCIAL1X2  [FIDUCIAL-1X2]  80.01,144.78 0 top
JP718  [1X06]  71.12,132.08 0 top
JP719  JUMPER-32-3  [SJ_3_PASTE2&3]  82.55,138.43 0 top
JP720  STAND-OFFTIGHT  [STAND-OFF-TIGHT]  72.39,143.51 0 top
JP721  STAND-OFFTIGHT  [STAND-OFF-TIGHT]  82.55,143.51 0 top
JP722  LOGO-SFESK  [SFE-LOGO-FLAME]  92.33,142.75 0 top
JP723  FIDUCIAL1X2  [FIDUCIAL-1X2]  86.87,138.43 0 top
JP724  FIDUCIAL1X2  [FIDUCIAL-1X2]  95.76,144.78 0 top
JP725  [1X06]  86.87,132.08 0 top
JP726  JUMPER-32-3  [SJ_3_PASTE2&3]  98.3,138.43 0 top
JP727  STAND-OFFTIGHT  [STAND-OFF-TIGHT]  88.14,143.51 0 top
JP728  STAND-OFFTIGHT  [STAND-OFF-TIGHT]  98.3,143.51 0 top
JP729  LOGO-SFESK  [SFE-LOGO-FLAME]  108.08,142.75 0 top
JP730  FIDUCIAL1X2  [FIDUCIAL-1X2]  102.62,138.43 0 top
JP731  FIDUCIAL1X2  [FIDUCIAL-1X2]  111.51,144.78 0 top
JP732  [1X06]  102.62,132.08 0 top
JP733  JUMPER-32-3  [SJ_3_PASTE2&3]  114.05,138.43 0 top